# Allegro board AVALON.brd
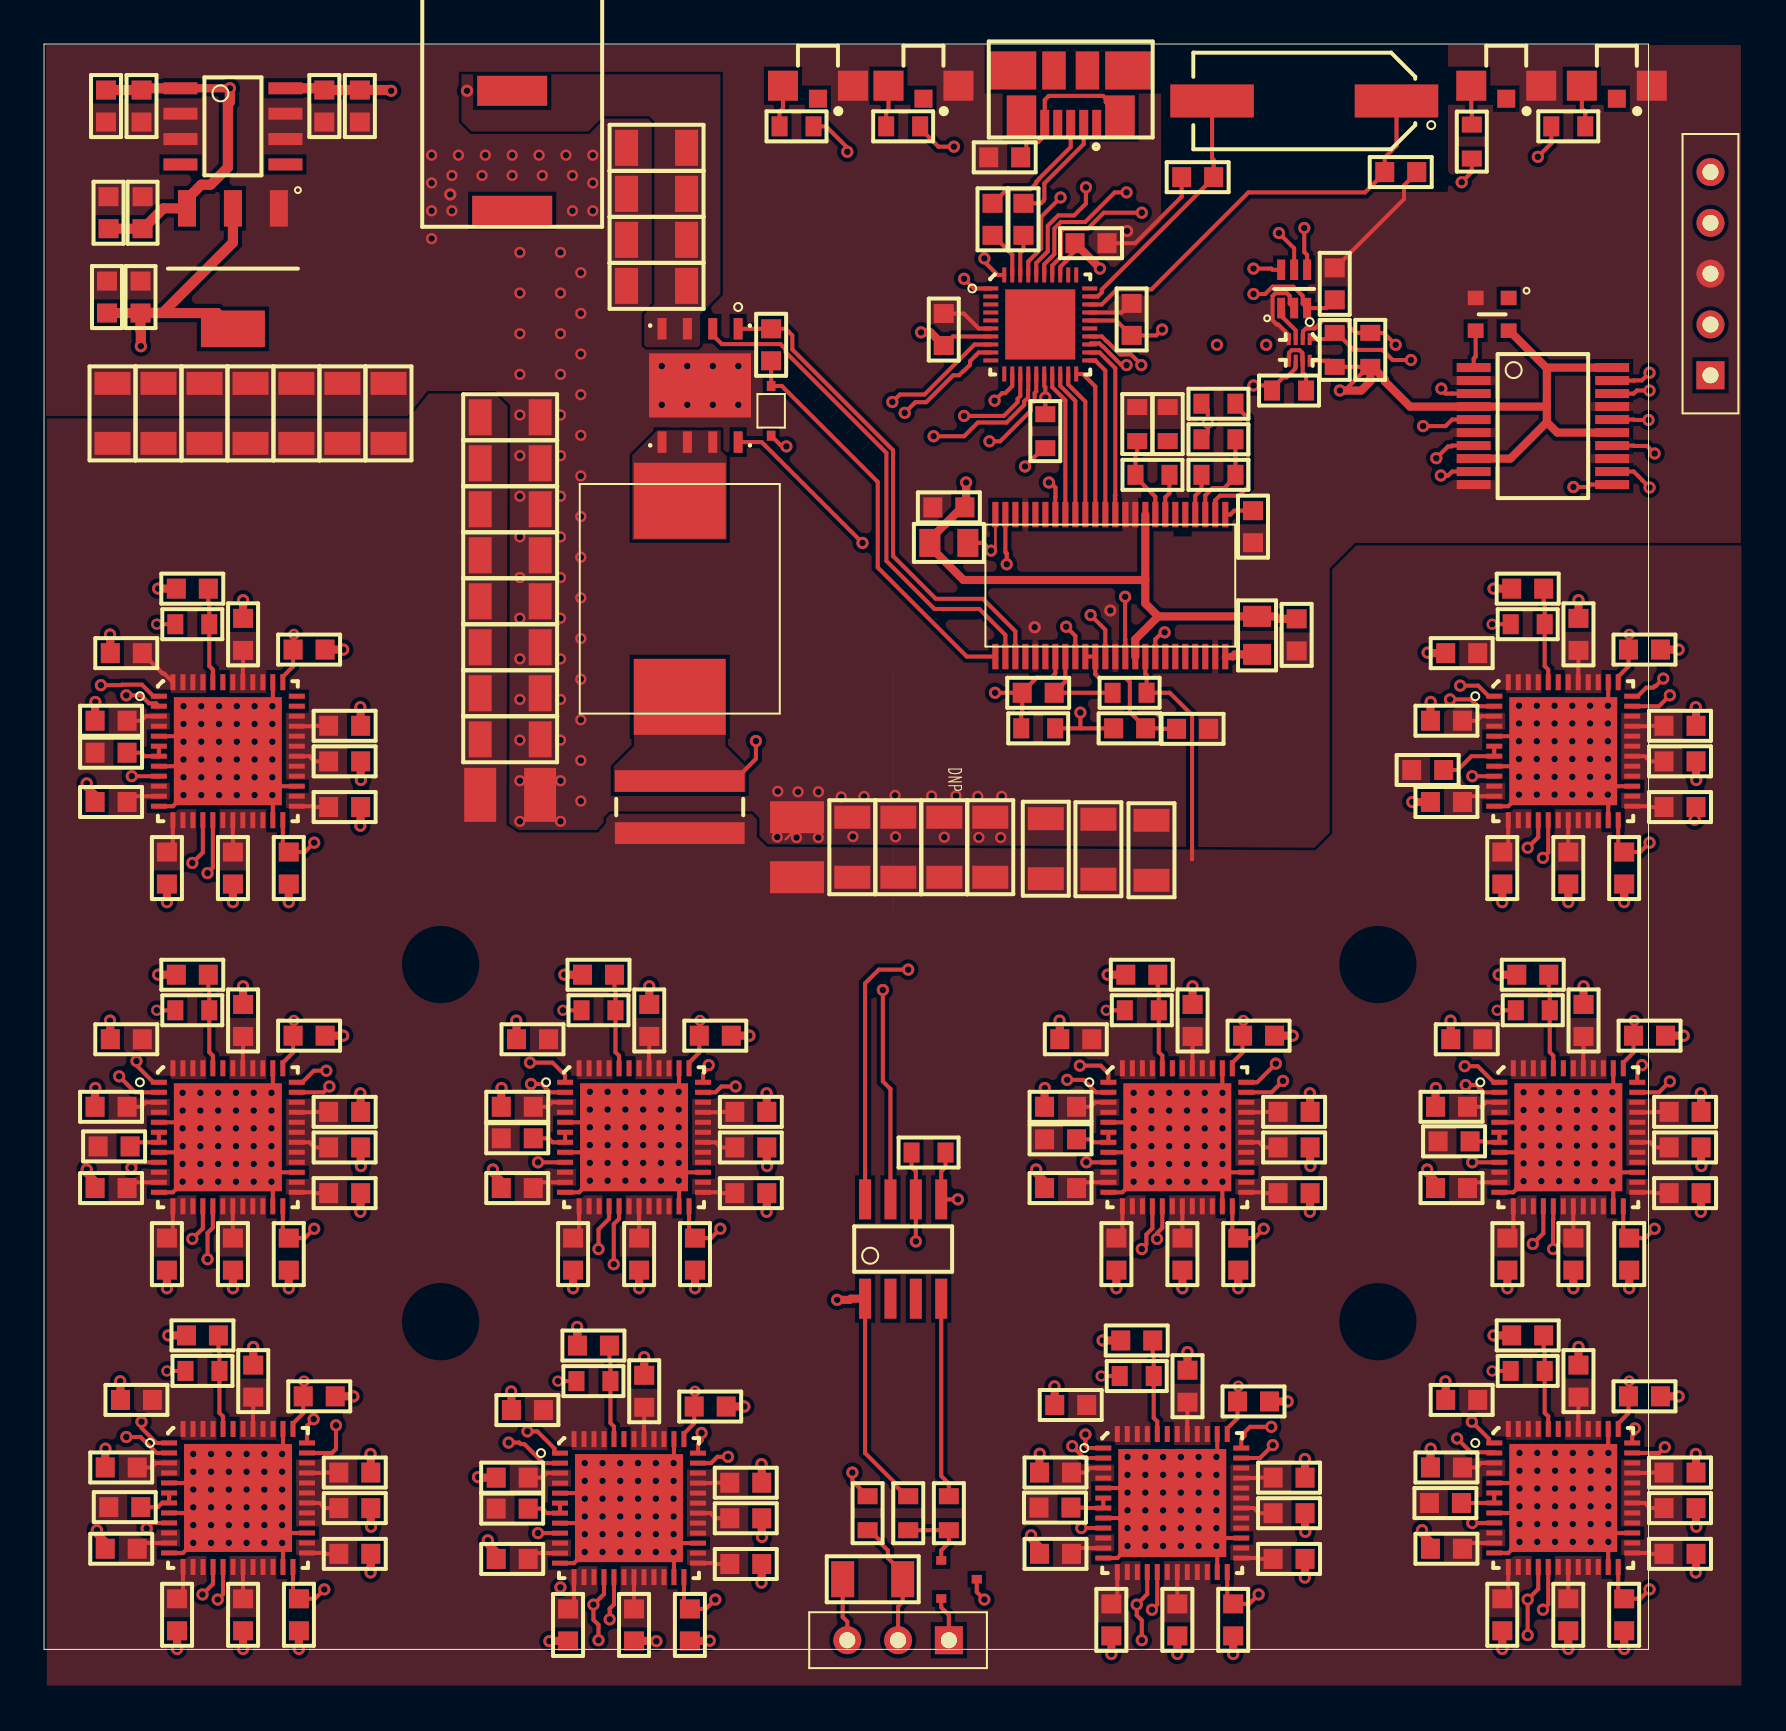
[diagram p0: board, top side]
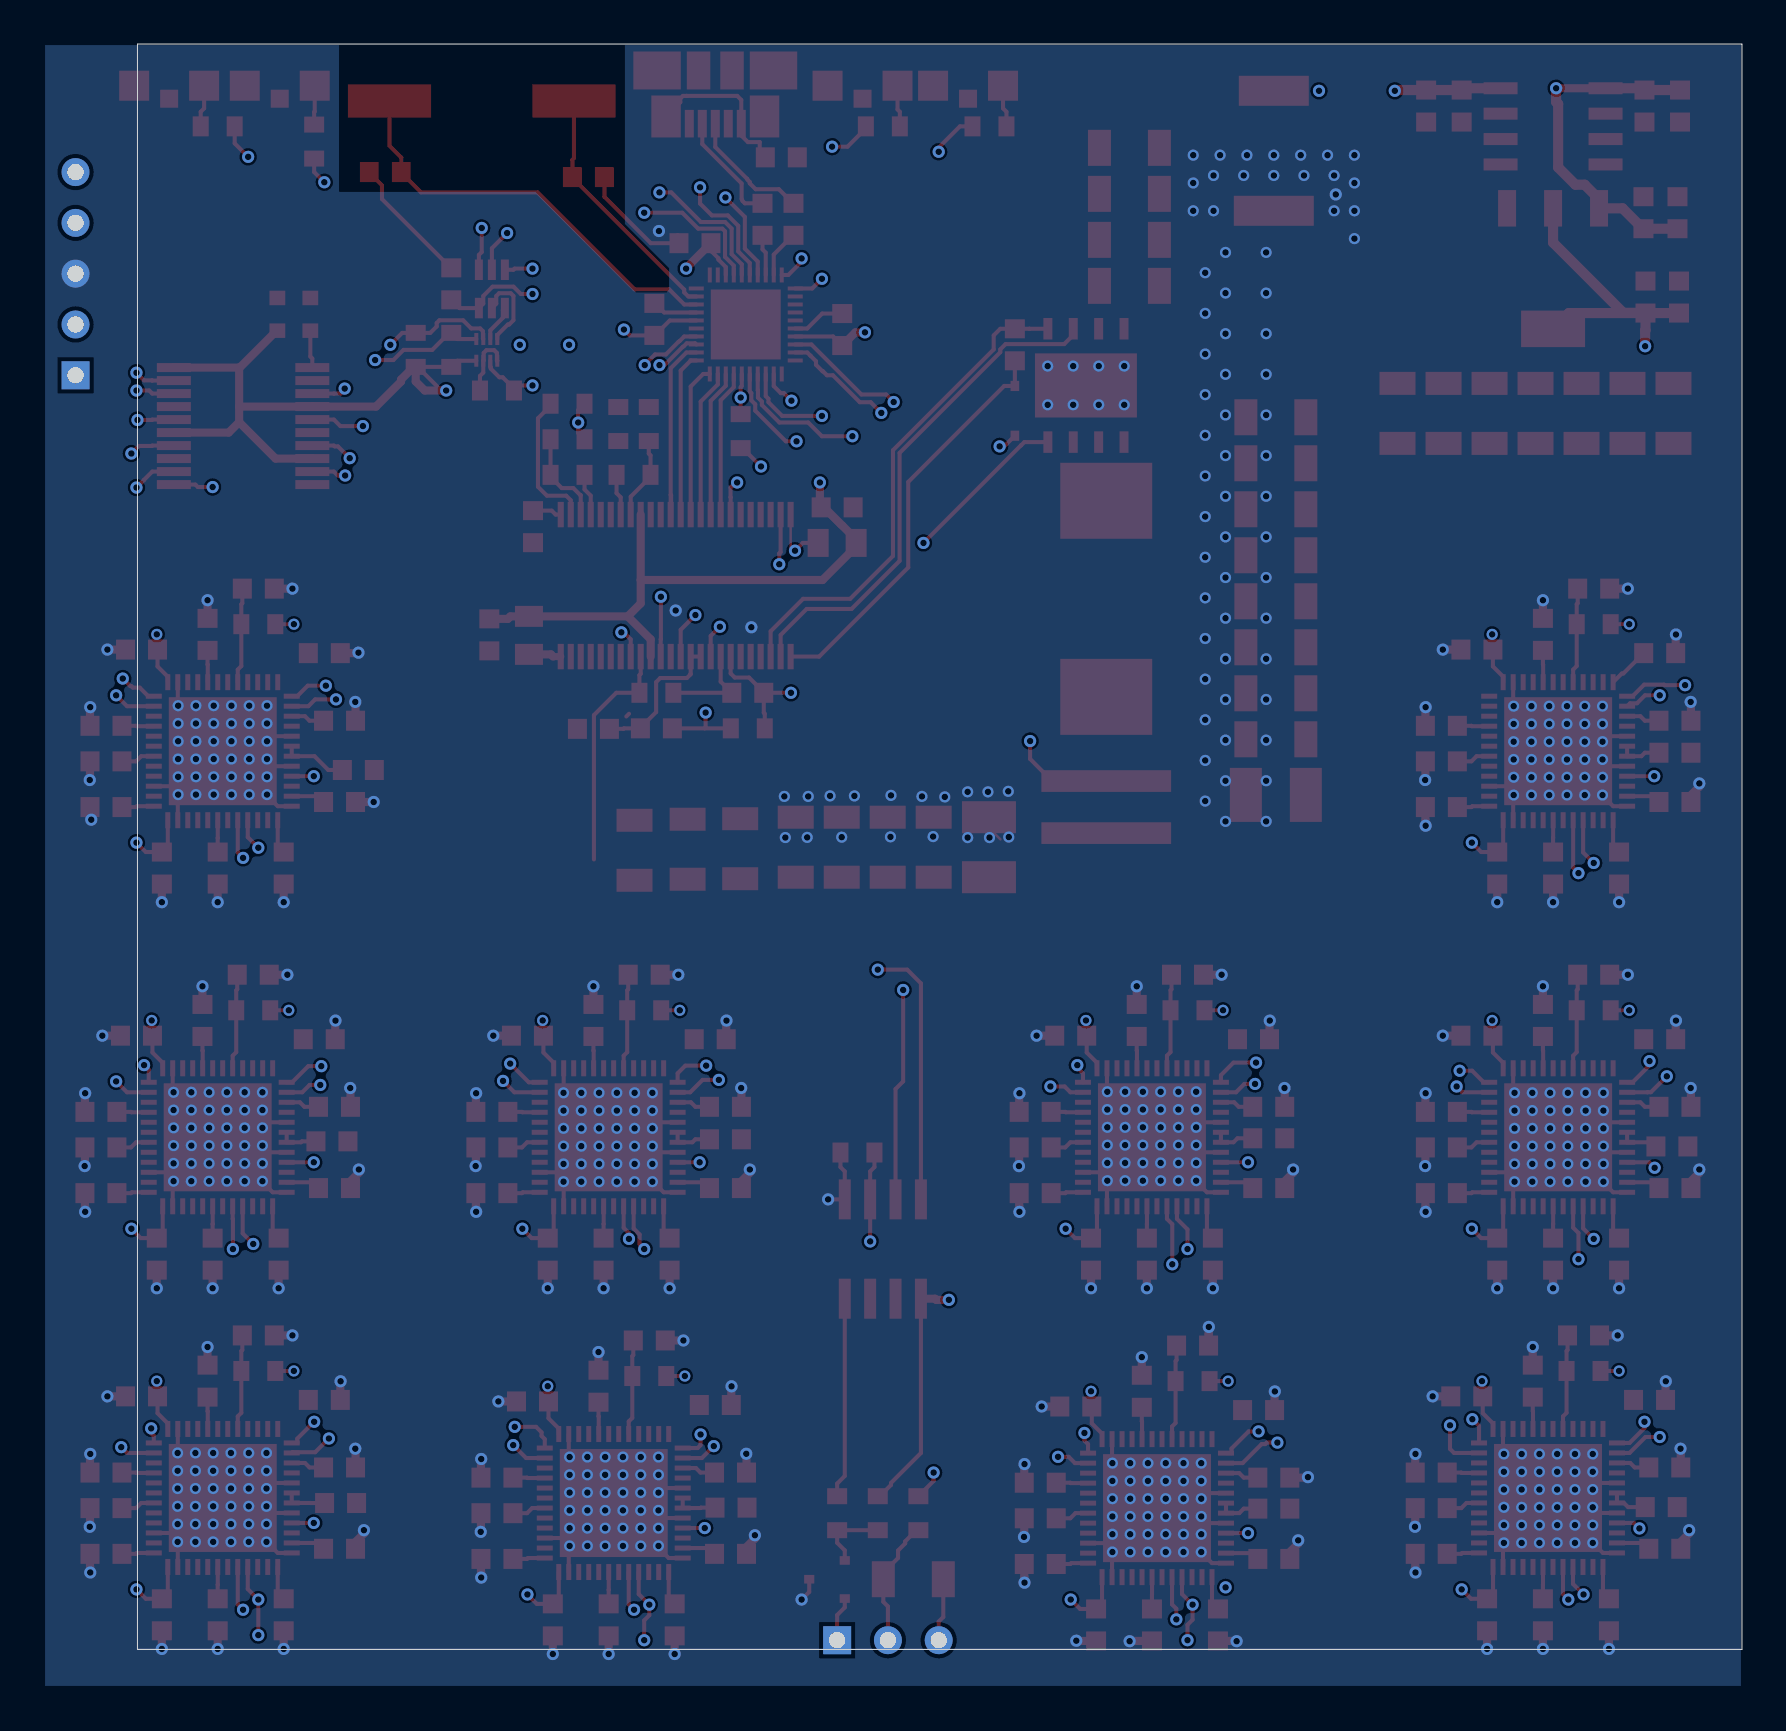
[diagram p1: board, bottom side, seen from below]

Outline 85.34 x 82.55 mm; copper layers: TOP, SIGNAL2, SIGNAL3, BOTTOM. Coordinates in mm from the lower left corner of the outline.
Outline path: 0,82.55 85.34,82.55 85.34,0 0,0 0,82.55 ; 0.2,82.35 80.47,82.35 80.47,2.08 0.2,2.08 0.2,82.35

## Placement (name value [footprint] x y rotation side)
C1  330uF  [CAP_2917]  23.52 44.81 0 top
C2  330uF  [CAP_2917]  37.87 42.19 90 top
C3  22uF  [CAP_0603]  36.58 67.31 90 top
C4  1200pF  [CAP_0603]  49.94 49.91 0 top
C5  1200pF  [CAP_0603]  54.51 48.13 180 top
C6  0.1uF  [CAP_0603]  57.66 48.11 0 top
C7  0.022uF  [CAP_0603]  60.68 58.22 90 top
C8  1uF  [CAP_0603]  62.86 52.81 90 top
C9  1uF  [CAP_0603]  45.47 59.18 0 top
C10  4.7uF  [CAP_1206]  30.84 77.16 0 top
C11  4.7uF  [CAP_1206]  30.84 72.56 0 top
C12  4.7uF  [CAP_1206]  30.84 74.86 0 top
C13  4.7uF  [CAP_1206]  30.84 70.26 0 top
C14  22uF  [CAP_1206]  23.52 47.59 0 top
C15  22uF  [CAP_1206]  45.24 42.19 90 top
C16  22uF  [CAP_1206]  15.13 63.88 90 top
C17  22uF  [CAP_1206]  8.23 63.88 90 top
C18  22uF  [CAP_1206]  3.63 63.88 90 top
C19  22uF  [CAP_1206]  17.43 63.88 90 top
C20  22uF  [CAP_1206]  50.32 42.11 90 top
C21  22uF  [CAP_1206]  10.53 63.88 90 top
C22  22uF  [CAP_1206]  12.83 63.88 90 top
C23  22uF  [CAP_1206]  5.93 63.88 90 top
C24  22uF  [CAP_1206]  23.52 52.19 0 top
C25  22uF  [CAP_1206]  47.54 42.19 90 top
C26  22uF  [CAP_1206]  42.94 42.19 90 top
C27  22uF  [CAP_1206]  40.64 42.19 90 top
C28  22uF  [CAP_1206]  23.52 49.89 0 top
C29  22uF  [CAP_1206]  23.52 63.69 0 top
C30  22uF  [CAP_1206]  23.52 61.39 0 top
C31  22uF  [CAP_1206]  55.6 42.04 90 top
C32  22uF  [CAP_1206]  23.52 56.79 0 top
C33  22uF  [CAP_1206]  52.95 42.09 90 top
C34  22uF  [CAP_1206]  23.52 54.49 0 top
C35  22uF  [CAP_1206]  23.52 59.09 0 top
C36  0.01uF  [CAP_0603]  3.35 69.7 90 top
C37  4.7uF  [CAP_0603]  5.03 69.7 90 top
C38  0.01uF  [CAP_0603]  5.13 73.91 90 top
C39  4.7uF  [CAP_0603]  3.43 73.91 90 top
C40  0.01uF  [CAP_0603]  14.22 79.25 270 top
C41  4.7uF  [CAP_0603]  16 79.25 270 top
C42  0.01uF  [CAP_0603]  5.08 79.25 270 top
C43  4.7uF  [CAP_0603]  3.3 79.25 270 top
C44  0.01uF  [CAP_0603]  45.21 68.07 90 top
C45  4.7uF  [CAP_0603]  52.58 72.39 0 top
C46  0.01uF  [CAP_0603]  54.61 68.58 90 top
C47  0.47uF  [CAP_0603]  35.31 8.64 0 top
C48  0.47uF  [CAP_0603]  24.38 14.05 180 top
C49  0.47uF  [CAP_0603]  26.42 3.3 270 top
C50  0.47uF  [CAP_0603]  35.31 6.35 0 top
C51  0.47uF  [CAP_0603]  29.72 3.3 270 top
C52  0.47uF  [CAP_0603]  30.23 14.99 90 top
C53  0.47uF  [CAP_0603]  23.88 25.15 180 top
C54  0.47uF  [CAP_0603]  23.62 10.67 180 top
C55  0.47uF  [CAP_0603]  33.53 14.22 0 top
C56  0.47uF  [CAP_0603]  32.51 3.3 270 top
C57  0.47uF  [CAP_0603]  27.94 35.81 0 top
C58  0.47uF  [CAP_0603]  35.56 28.96 0 top
C59  0.47uF  [CAP_0603]  35.56 27.18 0 top
C60  0.47uF  [CAP_0603]  24.64 32.59 180 top
C61  0.47uF  [CAP_0603]  26.67 21.84 270 top
C62  0.47uF  [CAP_0603]  35.56 24.89 0 top
C63  0.47uF  [CAP_0603]  33.78 32.77 0 top
C64  0.47uF  [CAP_0603]  32.77 21.84 270 top
C65  0.47uF  [CAP_0603]  27.69 17.27 0 top
C66  0.47uF  [CAP_0603]  70.36 11.18 180 top
C67  0.47uF  [CAP_0603]  3.56 48.51 180 top
C68  0.47uF  [CAP_0603]  23.88 29.21 180 top
C69  0.47uF  [CAP_0603]  4.32 51.89 180 top
C70  0.47uF  [CAP_0603]  6.35 41.15 270 top
C71  0.47uF  [CAP_0603]  15.24 44.2 0 top
C72  0.47uF  [CAP_0603]  9.65 41.15 270 top
C73  0.47uF  [CAP_0603]  62.48 6.6 0 top
C74  0.47uF  [CAP_0603]  10.16 52.83 90 top
C75  0.47uF  [CAP_0603]  59.69 3.56 270 top
C76  0.47uF  [CAP_0603]  12.95 3.81 270 top
C77  0.47uF  [CAP_0603]  8.13 17.78 0 top
C78  0.47uF  [CAP_0603]  56.9 3.56 270 top
C79  0.47uF  [CAP_0603]  57.4 15.24 90 top
C80  0.47uF  [CAP_0603]  82.04 9.14 0 top
C81  0.47uF  [CAP_0603]  50.8 10.92 180 top
C82  0.47uF  [CAP_0603]  71.12 14.55 180 top
C83  0.47uF  [CAP_0603]  73.15 3.81 270 top
C84  0.47uF  [CAP_0603]  82.04 6.86 0 top
C85  0.47uF  [CAP_0603]  76.45 3.81 270 top
C86  0.47uF  [CAP_0603]  76.96 15.49 90 top
C87  0.47uF  [CAP_0603]  12.45 41.15 270 top
C88  0.47uF  [CAP_0603]  79.25 3.81 270 top
C89  0.47uF  [CAP_0603]  7.62 35.81 0 top
C90  0.47uF  [CAP_0603]  62.74 24.89 0 top
C91  0.47uF  [CAP_0603]  57.15 21.84 270 top
C92  0.47uF  [CAP_0603]  57.66 33.53 90 top
C93  0.47uF  [CAP_0603]  73.41 21.84 270 top
C94  0.47uF  [CAP_0603]  51.05 29.21 180 top
C95  0.47uF  [CAP_0603]  82.3 24.89 0 top
C96  0.47uF  [CAP_0603]  76.71 21.84 270 top
C97  0.47uF  [CAP_0603]  77.22 33.53 90 top
C98  0.47uF  [CAP_0603]  70.61 29.21 180 top
C99  0.47uF  [CAP_0603]  79.5 21.84 270 top
C100  0.47uF  [CAP_0603]  13.46 52.07 0 top
C101  0.47uF  [CAP_0603]  7.62 55.12 0 top
C102  0.47uF  [CAP_0603]  29.97 21.84 270 top
C103  0.47uF  [CAP_0603]  15.24 48.26 0 top
C104  0.47uF  [CAP_0603]  3.56 44.45 180 top
C105  0.47uF  [CAP_0603]  50.8 6.86 180 top
C106  0.47uF  [CAP_0603]  15.24 46.48 0 top
C107  0.47uF  [CAP_0603]  62.48 10.67 0 top
C108  0.47uF  [CAP_0603]  53.59 3.56 270 top
C109  0.47uF  [CAP_0603]  62.48 8.89 0 top
C110  0.47uF  [CAP_0603]  51.56 14.3 180 top
C111  0.47uF  [CAP_0603]  60.71 14.48 0 top
C112  0.47uF  [CAP_0603]  80.26 14.73 0 top
C113  0.47uF  [CAP_0603]  74.42 17.78 0 top
C114  0.47uF  [CAP_0603]  70.36 44.45 180 top
C115  0.47uF  [CAP_0603]  71.12 51.89 180 top
C116  0.47uF  [CAP_0603]  82.04 48.26 0 top
C117  0.47uF  [CAP_0603]  82.04 46.48 0 top
C118  0.47uF  [CAP_0603]  70.36 7.11 180 top
C119  0.47uF  [CAP_0603]  82.04 10.92 0 top
C120  0.47uF  [CAP_0603]  51.05 25.15 180 top
C121  0.47uF  [CAP_0603]  62.74 28.96 0 top
C122  0.47uF  [CAP_0603]  62.74 27.18 0 top
C123  0.47uF  [CAP_0603]  79.25 41.15 270 top
C124  0.47uF  [CAP_0603]  80.26 52.07 0 top
C125  0.47uF  [CAP_0603]  51.82 32.59 180 top
C126  0.47uF  [CAP_0603]  53.85 21.84 270 top
C127  0.47uF  [CAP_0603]  70.61 25.15 180 top
C128  0.47uF  [CAP_0603]  10.16 3.81 270 top
C129  0.47uF  [CAP_0603]  60.96 32.77 0 top
C130  0.47uF  [CAP_0603]  59.94 21.84 270 top
C131  0.47uF  [CAP_0603]  54.86 17.53 0 top
C132  0.47uF  [CAP_0603]  82.3 28.96 0 top
C133  0.47uF  [CAP_0603]  82.3 27.18 0 top
C134  0.47uF  [CAP_0603]  4.06 7.11 180 top
C135  0.47uF  [CAP_0603]  71.37 32.59 180 top
C136  0.47uF  [CAP_0603]  15.75 10.92 0 top
C137  0.47uF  [CAP_0603]  15.75 9.14 0 top
C138  0.47uF  [CAP_0603]  4.83 14.55 180 top
C139  0.47uF  [CAP_0603]  6.86 3.81 270 top
C140  0.47uF  [CAP_0603]  15.75 6.86 0 top
C141  0.47uF  [CAP_0603]  80.52 32.77 0 top
C142  0.47uF  [CAP_0603]  13.97 14.73 0 top
C143  0.47uF  [CAP_0603]  55.12 35.81 0 top
C144  0.47uF  [CAP_0603]  4.32 32.59 180 top
C145  0.47uF  [CAP_0603]  10.67 15.49 90 top
C146  0.47uF  [CAP_0603]  4.06 11.18 180 top
C147  0.47uF  [CAP_0603]  3.56 25.15 180 top
C148  0.47uF  [CAP_0603]  15.24 28.96 0 top
C149  0.47uF  [CAP_0603]  74.42 55.12 0 top
C150  0.47uF  [CAP_0603]  73.15 41.15 270 top
C151  0.47uF  [CAP_0603]  82.04 44.2 0 top
C152  0.47uF  [CAP_0603]  76.45 41.15 270 top
C153  0.47uF  [CAP_0603]  15.24 27.18 0 top
C154  0.47uF  [CAP_0603]  30.48 33.53 90 top
C155  0.47uF  [CAP_0603]  6.35 21.84 270 top
C156  0.47uF  [CAP_0603]  15.24 24.89 0 top
C157  0.47uF  [CAP_0603]  13.46 32.77 0 top
C158  0.47uF  [CAP_0603]  12.45 21.84 270 top
C159  0.47uF  [CAP_0603]  74.68 35.81 0 top
C160  0.47uF  [CAP_0603]  9.65 21.84 270 top
C161  0.47uF  [CAP_0603]  10.16 33.53 90 top
C162  0.47uF  [CAP_0603]  23.62 6.6 180 top
C163  0.47uF  [CAP_0603]  3.56 29.21 180 top
C164  0.47uF  [CAP_0603]  76.96 52.83 90 top
C165  0.47uF  [CAP_0603]  35.31 10.41 0 top
C166  0.47uF  [CAP_0603]  70.36 48.51 180 top
C167  30pF  [CAP_0603]  64.77 70.36 270 top
C168  XuF  [CAP_0603]  57.91 75.69 180 top
C169  XuF  [CAP_0603]  68.07 75.95 0 top
D1  CMDSH-3  [SOD323]  36.58 64.01 90 top
D2  LED  [APA3010SRCPRV-GX]  78.88 80.26 180 top
D3  LED  [APA3010SRCPRV-GX]  73.35 80.26 180 top
D4  LED  [APA3010SRCPRV-GX]  44.2 80.26 180 top
D5  LED  [APA3010SRCPRV-GX]  38.92 80.26 180 top
H1  Drill - Unplated M3  [PART_DRILL_M3_33000MM]  20.04 18.47 0 top
H2  Drill - Unplated M3  [PART_DRILL_M3_33000MM]  66.93 18.47 0 top
H3  Drill - Unplated M3  [PART_DRILL_M3_33000MM]  66.93 36.32 0 top
H4  Drill - Unplated M3  [PART_DRILL_M3_33000MM]  20.04 36.32 0 top
J1  CUI PJ-037BH  [CUI_PJ_037BH]  23.62 80.01 270 top
J2  ICSP  [HEADER100_5]  83.57 70.87 180 top
J3  Molex 0473460001  [MOLEX_0473460001]  51.56 81.03 270 top
J4  FAN  [HEADER100_3]  42.93 2.54 270 top
L1  560nH  [ETQ-P4L]  32 54.61 270 top
L2  BLM18HE102SN1D  [IND_0603]  49.2 73.58 270 top
L3  BLM18HE102SN1D  [IND_0603]  47.65 73.58 270 top
L4  BLM18HE102SN1D  [IND_0603]  48.26 76.68 180 top
L5  BLM18HE102SN1D  [IND_0603]  23.88 27.64 180 top
L6  BLM18HE102SN1D  [IND_0603]  23.62 9.12 180 top
L7  BLM18HE102SN1D  [IND_0603]  4.24 9.19 180 top
L8  BLM18HE102SN1D  [IND_0603]  3.71 27.23 180 top
L9  BLM18HE102SN1D  [IND_0603]  3.56 46.91 180 top
L10  BLM18HE102SN1D  [IND_0603]  69.42 46.05 180 top
L11  BLM18HE102SN1D  [IND_0603]  70.74 27.48 180 top
L12  BLM18HE102SN1D  [IND_0603]  70.31 9.4 180 top
L13  BLM18HE102SN1D  [IND_0603]  50.77 9.17 180 top
L14  BLM18HE102SN1D  [IND_0603]  51.05 27.58 180 top
Q1  BC817-25-7-F  [SOT23]  45.97 5.59 0 top
R1  10  [RES_0805]  60.88 52.78 90 top
R2  0  [RES_0603]  58.95 64.36 0 top
R3  5.11k  [RES_0603]  58.95 62.59 180 top
R4  0  [RES_0603]  58.95 60.81 0 top
R5  5.11k  [RES_0603]  56.41 63.35 270 top
R6  1.21k  [RES_0603]  55.65 60.81 0 top
R7  100k  [RES_0603]  54.89 63.35 270 top
R9  0.003  [RES_1225]  32 44.2 270 top
R10  182  [RES_0603]  54.51 49.91 0 top
R11  100  [RES_0603]  49.94 48.13 180 top
R12  2.2  [RES_0805]  45.47 57.4 180 top
R13  75-100  [RES_0603]  76.45 78.23 0 top
R14  75-100  [RES_0603]  71.63 77.47 90 top
R15  75-100  [RES_0603]  43.18 78.23 180 top
R16  75-100  [RES_0603]  37.85 78.23 180 top
R17  100k  [RES_0603]  27.94 34.04 0 top
R18  100k  [RES_0603]  27.69 15.49 0 top
R19  100k  [RES_0603]  8.13 16 0 top
R20  100k  [RES_0603]  7.62 34.04 0 top
R21  100k  [RES_0603]  7.62 53.34 0 top
R22  100k  [RES_0603]  74.42 16 0 top
R23  100k  [RES_0603]  54.86 15.75 0 top
R24  100k  [RES_0603]  55.12 34.04 0 top
R25  100k  [RES_0603]  74.42 53.34 0 top
R26  100k  [RES_0603]  74.68 34.04 0 top
R27  1k  [RES_0603]  64.77 67.06 270 top
R28  1k  [RES_0603]  66.55 67.06 270 top
R29  100  [RES_0603]  62.48 65.02 180 top
R30  40k  [RES_0603]  50.29 62.99 90 top
R31  1k, 1/4W  [RES_1206]  41.66 5.59 0 top
R32  13k  [RES_0603]  41.4 8.89 270 top
R33  10k  [RES_0603]  44.45 26.92 180 top
R34  10  [RES_0603]  45.47 8.89 270 top
R35  470  [RES_0603]  43.43 8.89 90 top
U1  LM27213  [DGG]  53.54 55.27 90 top
U3  AP1117IE33G-13  [SOT224]  9.65 71.12 270 top
U4  KA78L05AIDTF  [8-SOIC]  9.65 78.23 0 top
U5  IDT74FCT3807APYG  [20-SSOP]  75.18 63.25 0 top
U6  ASDMB-25.000MHz  [4-SMD-DFNLLC]  72.64 68.83 270 top
U7  PIC18F45K50  [40-UFQFN]  50.04 68.33 0 top
U8  BitSyncom A3255Q48  [QFN48]  29.72 27.69 0 top
U9  BitSyncom A3255Q48  [QFN48]  29.46 9.14 0 top
U10  BitSyncom A3255Q48  [QFN48]  9.91 9.65 0 top
U11  BitSyncom A3255Q48  [QFN48]  9.4 27.69 0 top
U12  BitSyncom A3255Q48  [QFN48]  9.4 46.99 0 top
U13  BitSyncom A3255Q48  [QFN48]  76.2 9.65 0 top
U14  BitSyncom A3255Q48  [QFN48]  56.64 9.4 0 top
U15  BitSyncom A3255Q48  [QFN48]  56.9 27.69 0 top
U16  BitSyncom A3255Q48  [QFN48]  76.2 46.99 0 top
U17  BitSyncom A3255Q48  [QFN48]  76.45 27.69 0 top
U18  74AUP2G02GF,115  [8-XSON]  62.99 67.06 270 top
U19  NL27WZ14DFT2G  [SC-88]  62.74 70.1 90 top
U20  LM63  [TI_D_R_PDSO_G8]  43.18 22.1 90 top
U21  CSD86350Q5D  [QFN127P600X500X150-9N]  33.02 65.28 270 top
Y1  CRYSTAL  [HC49_US]  63.25 79.5 180 top

## Library data of the parts
C1 C2 = CAPACITOR
C3-C169 = CAP NP: User Part Number: PartNr
D1 = DIODE SCHOTTKY
D2-D5 = LED_0
H1-H4 = Drill - Unplated M3
J1 = CONN JACK PWR_1
J2 = HEADER 5
J3 = Molex 0473460001
J4 = HEADER 3
L1 = INDUCTOR
L2-L14 = INDUCTOR_1: User Part Number: PartNr
Q1 = NPN BCE
R1-R7 R10-R35 = RESISTOR: User Part Number: PartNr
R9 = RESISTOR
U1 = LM27213
U3 = AP1117IE33G-13
U4 = KA78L05AIDTF
U5 = IDT74FCT3807APYG
U6 = ASDMB
U7 = PIC18F45K50
U8-U17 = BitSyncom A3255Q48
U18 = 74AUP2G02
U19 = NL27WZ14DFT2G
U20 = LM63
U21 = CSD86350Q5D
Y1 = CRYSTAL

## Footprints (pads in the part's own frame, mm; a bottom-side part is the same pattern mirrored in y, then rotated)
4-SMD-DFNLLC
  rect 0.725x0.79 smd: 1(-0.818,0.825) 2(-0.818,-0.825) 3(0.818,-0.825) 4(0.818,0.825)
8-SOIC
  rect 1.7x0.6 smd: 1(-2.625,1.905) 2(-2.625,0.635) 3(-2.625,-0.635) 4(-2.625,-1.905) 5(2.625,-1.905) 6(2.625,-0.635) 7(2.625,0.635) 8(2.625,1.905)
8-XSON
  rect 0.6x0.2 smd: 1(-0.543,0.525) 2(-0.543,0.175) 3(-0.543,-0.175) 4(-0.543,-0.525) 5(0.543,-0.525) 6(0.543,-0.175) 7(0.543,0.175) 8(0.543,0.525)
20-SSOP
  rect 1.7x0.45 smd: 1(-3.463,2.925) 2(-3.463,2.275) 3(-3.463,1.625) 4(-3.463,0.975) 5(-3.463,0.325) 6(-3.463,-0.325) 7(-3.463,-0.975) 8(-3.463,-1.625) 9(-3.463,-2.275) 10(-3.463,-2.925) 11(3.463,-2.925) 12(3.463,-2.275) 13(3.463,-1.625) 14(3.463,-0.975) 15(3.463,-0.325) 16(3.463,0.325) 17(3.463,0.975) 18(3.463,1.625) 19(3.463,2.275) 20(3.463,2.925)
40-UFQFN
  rect 3.5x3.5 smd: (0,0)
  rect 0.75x0.2 smd: 1(-2.475,1.8) 2(-2.475,1.4) 3(-2.475,1) 4(-2.475,0.6) 5(-2.475,0.2) 6(-2.475,-0.2) 7(-2.475,-0.6) 8(-2.475,-1) 9(-2.475,-1.4) 10(-2.475,-1.8) 21(2.475,-1.8) 22(2.475,-1.4) 23(2.475,-1) 24(2.475,-0.6) 25(2.475,-0.2) 26(2.475,0.2) 27(2.475,0.6) 28(2.475,1) 29(2.475,1.4) 30(2.475,1.8)
  rect 0.2x0.75 smd: 11(-1.8,-2.475) 12(-1.4,-2.475) 13(-1,-2.475) 14(-0.6,-2.475) 15(-0.2,-2.475) 16(0.2,-2.475) 17(0.6,-2.475) 18(1,-2.475) 19(1.4,-2.475) 20(1.8,-2.475) 31(1.8,2.475) 32(1.4,2.475) 33(1,2.475) 34(0.6,2.475) 35(0.2,2.475) 36(-0.2,2.475) 37(-0.6,2.475) 38(-1,2.475) 39(-1.4,2.475) 40(-1.8,2.475)
APA3010SRCPRV-GX
  rect 0.9x0.9 smd: (0,0.65)
  rect 1.5x1.5 smd: 1(-1.75,0) 2(1.75,0)
CAP_0603
  rect 0.95x1 smd: 1(-0.8,0) 2(0.8,0)
CAP_1206
  rect 1.15x1.8 smd: 1(-1.5,0) 2(1.5,0)
CAP_2917
  rect 1.6x2.7 smd: 1(-1.5,0) 2(1.5,0)
CUI_PJ_037BH
  rect 1.5x4 smd: 1(6,0)
  rect 1.5x3.5 smd: 2(0,0)
DGG
  rect 1.27x0.305 smd: 1(-3.55,5.75) 2(-3.55,5.25) 3(-3.55,4.75) 4(-3.55,4.25) 5(-3.55,3.75) 6(-3.55,3.25) 7(-3.55,2.75) 8(-3.55,2.25) 9(-3.55,1.75) 10(-3.55,1.25) 11(-3.55,0.75) 12(-3.55,0.25) 13(-3.55,-0.25) 14(-3.55,-0.75) 15(-3.55,-1.25) 16(-3.55,-1.75) 17(-3.55,-2.25) 18(-3.55,-2.75) 19(-3.55,-3.25) 20(-3.55,-3.75) 21(-3.55,-4.25) 22(-3.55,-4.75) 23(-3.55,-5.25) 24(-3.55,-5.75) 25(3.55,-5.75) 26(3.55,-5.25) 27(3.55,-4.75) 28(3.55,-4.25) 29(3.55,-3.75) 30(3.55,-3.25) 31(3.55,-2.75) 32(3.55,-2.25) 33(3.55,-1.75) 34(3.55,-1.25) 35(3.55,-0.75) 36(3.55,-0.25) 37(3.55,0.25) 38(3.55,0.75) 39(3.55,1.25) 40(3.55,1.75) 41(3.55,2.25) 42(3.55,2.75) 43(3.55,3.25) 44(3.55,3.75) 45(3.55,4.25) 46(3.55,4.75) 47(3.55,5.25) 48(3.55,5.75)
ETQ-P4L
  rect 3.8x4.6 smd: 1(-4.902,0) 2(4.902,0)
HC49_US
  rect 4.175x1.65 smd: 1(-4.613,0) 2(4.613,0)
HEADER100_3
  rect 1.4x1.4 hole 0.8: 1(0,2.54)
  round 1.4 hole 0.8: 2(0,0) 3(0,-2.54)
HEADER100_5
  rect 1.4x1.4 hole 0.8: 1(0,5.08)
  round 1.4 hole 0.8: 2(0,2.54) 3(0,0) 4(0,-2.54) 5(0,-5.08)
IND_0603
  rect 0.95x1 smd: 1(-0.8,0) 2(0.8,0)
MOLEX_0473460001
  rect 1.9x2.375 smd: (0,2.913) (0,-2.913)
  rect 1.9x1.175 smd: (0,0.837) (0,-0.837)
  rect 2.1x1.475 smd: (2.3,-2.462) 6(2.3,2.463)
  rect 1.38x0.45 smd: 1(2.66,1.3) 2(2.66,0.65) 3(2.66,0) 4(2.66,-0.65) 5(2.66,-1.3)
PART_DRILL_M3_33000MM
  round 0 smd: 1(0,0)
QFN48
  rect 0.8x0.25 smd: 1(-3.45,2.75) 2(-3.45,2.25) 3(-3.45,1.75) 4(-3.45,1.25) 5(-3.45,0.75) 6(-3.45,0.25) 7(-3.45,-0.25) 8(-3.45,-0.75) 9(-3.45,-1.25) 10(-3.45,-1.75) 11(-3.45,-2.25) 12(-3.45,-2.75) 25(3.45,-2.75) 26(3.45,-2.25) 27(3.45,-1.75) 28(3.45,-1.25) 29(3.45,-0.75) 30(3.45,-0.25) 31(3.45,0.25) 32(3.45,0.75) 33(3.45,1.25) 34(3.45,1.75) 35(3.45,2.25) 36(3.45,2.75)
  rect 0.25x0.8 smd: 13(-2.75,-3.45) 14(-2.25,-3.45) 15(-1.75,-3.45) 16(-1.25,-3.45) 17(-0.75,-3.45) 18(-0.25,-3.45) 19(0.25,-3.45) 20(0.75,-3.45) 21(1.25,-3.45) 22(1.75,-3.45) 23(2.25,-3.45) 24(2.75,-3.45) 37(2.75,3.45) 38(2.25,3.45) 39(1.75,3.45) 40(1.25,3.45) 41(0.75,3.45) 42(0.25,3.45) 43(-0.25,3.45) 44(-0.75,3.45) 45(-1.25,3.45) 46(-1.75,3.45) 47(-2.25,3.45) 48(-2.75,3.45)
  rect 5.4x5.4 smd: 49(0,0)
QFN127P600X500X150-9N
  rect 1.075x0.45 smd: 1(-2.833,-1.905) 2(-2.833,-0.635) 3(-2.833,0.635) 4(-2.833,1.905) 5(2.833,1.905) 6(2.833,0.635) 7(2.833,-0.635) 8(2.833,-1.905)
  rect 3.206x5.1 smd: 9(0,0)
RES_0603
  rect 0.8x1 smd: 1(-0.85,0) 2(0.85,0)
RES_0805
  rect 1.05x1.4 smd: 1(-0.95,0) 2(0.95,0)
RES_1206
  rect 1.15x1.8 smd: 1(-1.5,0) 2(1.5,0)
RES_1225
  rect 1.085x6.49 smd: 1(-1.301,0) 2(1.301,0)
SC-88
  rect 1.025x0.4 smd: 1(-0.958,0.65) 2(-0.958,0) 3(-0.958,-0.65) 4(0.958,-0.65) 5(0.958,0) 6(0.958,0.65)
SOD323
  rect 0.508x0.432 smd: 1(-1.245,0) 2(1.245,0)
SOT23
  rect 0.508x0.432 smd: 1(-0.889,0.94) 2(-0.889,-0.965) 3(0.889,0)
SOT224
  rect 1.825x0.9 smd: 1(-3.013,2.3) 2(-3.013,0) 3(-3.013,-2.3)
  rect 1.825x3.2 smd: 4(3.013,0)
TI_D_R_PDSO_G8
  rect 2x0.6 smd: 1(-2.483,1.905) 2(-2.483,0.635) 3(-2.483,-0.635) 4(-2.483,-1.905) 5(2.483,-1.905) 6(2.483,-0.635) 7(2.483,0.635) 8(2.483,1.905)

## Nets
3V3: C36.1 C37.1 C44.1 C45.1 C46.1 C55.1 C56.1 C63.1 C64.1 C75.1 C76.1 C87.1 C88.1 C99.1 C100.1 C111.1 C112.1 C123.1 C124.1 C129.1 C130.1 C141.1 C142.1 C157.1 C158.1 J2.2 R17.1 R18.1 R19.1 R20.1 R21.1 R22.1 R23.1 R24.1 R25.1 R26.1 R27.2 R28.2 R30.1 R35.2 U3.2(VOUT) U3.4(VOUT2) U5.4(VCC) U5.8(VCC2) U5.15(VCC3) U5.20(VCC4) U6.4(VDD) U7.7(VDD) U7.26(VDD2) U7.33(VUSB3V3) U8.24(OVDD1) U8.37(OVDD0) U9.24(OVDD1) U9.37(OVDD0) U10.24(OVDD1) U10.37(OVDD0) U11.24(OVDD1) U11.37(OVDD0) U12.24(OVDD1) U12.37(OVDD0) U13.24(OVDD1) U13.37(OVDD0) U14.24(OVDD1) U14.37(OVDD0) U15.24(OVDD1) U15.37(OVDD0) U16.24(OVDD1) U16.37(OVDD0) U17.24(OVDD1) U17.37(OVDD0) U18.8(VCC) U19.5(VCC) U20.1(VDD)
5V0: C8.2 C9.2 C38.1 C39.1 C42.1 C43.1 R1.2 R12.2 U1.15(XPOK) U1.33(SLP) U1.42(VR_ON) U3.3(VIN) U4.1(VOUT)
GND: C1.2 C2.2 C6.2 C7.1 C8.1 C9.1 C10.1 C11.1 C12.1 C13.1 C14.2 C15.2 C16.2 C17.2 C18.2 C19.2 C20.2 C21.2 C22.2 C23.2 C24.2 C25.2 C26.2 C27.2 C28.2 C29.2 C30.2 C31.2 C32.2 C33.2 C34.2 C35.2 C36.2 C37.2 C38.2 C39.2 C40.2 C41.2 C42.2 C43.2 C44.2 C45.2 C46.2 C47.2 C48.2 C49.2 C50.2 C51.2 C52.2 C53.2 C54.2 C55.2 C56.2 C57.1 C58.2 C59.2 C60.2 C61.2 C62.2 C63.2 C64.2 C65.1 C66.2 C67.2 C68.2 C69.2 C70.2 C71.2 C72.2 C73.2 C74.2 C75.2 C76.2 C77.1 C78.2 C79.2 C80.2 C81.2 C82.2 C83.2 C84.2 C85.2 C86.2 C87.2 C88.2 C89.1 C90.2 C91.2 C92.2 C93.2 C94.2 C95.2 C96.2 C97.2 C98.2 C99.2 C100.2 C101.1 C102.2 C103.2 C104.2 C105.2 C106.2 C107.2 C108.2 C109.2 C110.2 C111.2 C112.2 C113.1 C114.2 C115.2 C116.2 C117.2 C118.2 C119.2 C120.2 C121.2 C122.2 C123.2 C124.2 C125.2 C126.2 C127.2 C128.2 C129.2 C130.2 C131.1 C132.2 C133.2 C134.2 C135.2 C136.2 C137.2 C138.2 C139.2 C140.2 C141.2 C142.2 C143.1 C144.2 C145.2 C146.2 C147.2 C148.2 C149.1 C150.2 C151.2 C152.2 C153.2 C154.2 C155.2 C156.2 C157.2 C158.2 C159.1 C160.2 C161.2 C162.2 C163.2 C164.2 C165.2 C166.2 C167.1 C168.2 C169.2 D2.1(CATHODE) D3.1(CATHODE) D4.1(CATHODE) D5.1(CATHODE) J1.2 J2.3 L4.2 Q1.3(E) R5.1 R7.1 R33.1 U1.5(SRCK) U1.13(DGND) U1.23(SGND) U1.34(STP_CPU#) U1.35(DE_EN#) U1.45(PGND) U3.1(GND) U4.2(GND) U4.3(GND2) U4.6(GND3) U4.7(GND4) U5.2(GND) U5.6(GND2) U5.10(GND3) U5.13(GND4) U5.17(GND5) U6.2(GND) U7.6(VSS) U7.27(VSS2) U8.5(VSSA_PLL) U8.8(VSS_PLL) U8.12(DVSS) U8.23(OVSS1) U8.27(VSS) U8.38(OVSS0) U8.49(EPVSS) U9.5(VSSA_PLL) U9.8(VSS_PLL) U9.12(DVSS) U9.23(OVSS1) U9.27(VSS) U9.38(OVSS0) U9.49(EPVSS) U10.5(VSSA_PLL) U10.8(VSS_PLL) U10.12(DVSS) U10.23(OVSS1) U10.27(VSS) U10.38(OVSS0) U10.49(EPVSS) U11.5(VSSA_PLL) U11.8(VSS_PLL) U11.12(DVSS) U11.23(OVSS1) U11.27(VSS) U11.38(OVSS0) U11.49(EPVSS) U12.5(VSSA_PLL) U12.8(VSS_PLL) U12.12(DVSS) U12.23(OVSS1) U12.27(VSS) U12.38(OVSS0) U12.49(EPVSS) U13.5(VSSA_PLL) U13.8(VSS_PLL) U13.12(DVSS) U13.23(OVSS1) U13.27(VSS) U13.38(OVSS0) U13.49(EPVSS) U14.5(VSSA_PLL) U14.8(VSS_PLL) U14.12(DVSS) U14.23(OVSS1) U14.27(VSS) U14.38(OVSS0) U14.49(EPVSS) U15.5(VSSA_PLL) U15.8(VSS_PLL) U15.12(DVSS) U15.23(OVSS1) U15.27(VSS) U15.38(OVSS0) U15.49(EPVSS) U16.5(VSSA_PLL) U16.8(VSS_PLL) U16.12(DVSS) U16.23(OVSS1) U16.27(VSS) U16.38(OVSS0) U16.49(EPVSS) U17.5(VSSA_PLL) U17.8(VSS_PLL) U17.12(DVSS) U17.23(OVSS1) U17.27(VSS) U17.38(OVSS0) U17.49(EPVSS) U18.4(GND) U19.2(GND) U20.5(GND) U21.9(PGND)
VIN: C10.2 C11.2 C12.2 C13.2 C40.1 C41.1 J1.1 J4.3 R31.1 U4.8(VIN) U21.1(VIN) U21.2(VIN2)
CK_EN: U1.12(CK_EN#) U7.23(RE0)
CLK1: U5.3(O1) U16.9(XCLKIN)
CLK2: U5.16(O8) U17.9(XCLKIN)
CLK3: U5.18(O9) U13.9(XCLKIN)
CLK4: U5.19(O10) U14.9(XCLKIN)
CLK5: U5.14(O7) U15.9(XCLKIN)
CLK6: U5.11(O5) U8.9(XCLKIN)
CLK7: U5.12(O6) U9.9(XCLKIN)
CLK8: U5.9(O4) U10.9(XCLKIN)
CLK9: U5.7(O3) U11.9(XCLKIN)
CLK10: U5.5(O2) U12.9(XCLKIN)
D+: L3.2 U7.39(D+)
D-: L2.2 U7.38(D-)
FANCLK: U7.9(RB1) U20.8(SMBCLK)
FANDAT: U7.8(RB0) U20.7(SMBDAT)
FANPWM: R34.1 U20.4(PWM)
H: H1.1(H) H2.1(H) H3.1(H) H4.1(H)
IC1_NO: U16.35(CONFIG_NO) U17.2(CONFIG_NI)
IC1_PO: U16.36(CONFIG_PO) U17.1(CONFIG_PI)
IC2_NO: U13.2(CONFIG_NI) U17.35(CONFIG_NO)
IC2_PO: U13.1(CONFIG_PI) U17.36(CONFIG_PO)
IC3_NO: U13.35(CONFIG_NO) U14.2(CONFIG_NI)
IC3_PO: U13.36(CONFIG_PO) U14.1(CONFIG_PI)
IC4_NO: U14.35(CONFIG_NO) U15.2(CONFIG_NI)
IC4_PO: U14.36(CONFIG_PO) U15.1(CONFIG_PI)
IC5_NO: U8.2(CONFIG_NI) U15.35(CONFIG_NO)
IC5_PO: U8.1(CONFIG_PI) U15.36(CONFIG_PO)
IC6_NO: U8.35(CONFIG_NO) U9.2(CONFIG_NI)
IC6_PO: U8.36(CONFIG_PO) U9.1(CONFIG_PI)
IC7_NO: U9.35(CONFIG_NO) U10.2(CONFIG_NI)
IC7_PO: U9.36(CONFIG_PO) U10.1(CONFIG_PI)
IC8_NO: U10.35(CONFIG_NO) U11.2(CONFIG_NI)
IC8_PO: U10.36(CONFIG_PO) U11.1(CONFIG_PI)
IC9_NO: U11.35(CONFIG_NO) U12.2(CONFIG_NI)
IC9_PO: U11.36(CONFIG_PO) U12.1(CONFIG_PI)
ICSPCLK: J2.5 U7.14(RB6)
ICSPDAT: J2.4 U7.15(RB7)
INV_CLK: U18.3(2Y) U19.1(IN_A1)
INV_DAT: C167.2 R29.2 U18.6(2B) U19.3(IN_A2)
LED0: R13.1 U7.34(RD0)
LED1: R14.1 U7.35(RD1)
LED2: R15.1 U7.36(RD2)
LED3: R16.1 U7.37(RD3)
MCLR: J2.1 R30.2 U7.16(MCLR/VPP/RE3)
OSC1: C169.1 U7.28(RA7) Y1.1
OSC2: C168.1 U7.29(RA6) Y1.2
PGOOD: U1.14(PGOOD) U7.24(RE1)
REP_N: R28.1 U8.16(REPORT_N) U9.16(REPORT_N) U10.16(REPORT_N) U11.16(REPORT_N) U12.16(REPORT_N) U13.16(REPORT_N) U14.16(REPORT_N) U15.16(REPORT_N) U16.16(REPORT_N) U17.16(REPORT_N) U18.2(1B)
REP_P: R27.1 U8.17(REPORT_P) U9.17(REPORT_P) U10.17(REPORT_P) U11.17(REPORT_P) U12.17(REPORT_P) U13.17(REPORT_P) U14.17(REPORT_P) U15.17(REPORT_P) U16.17(REPORT_P) U17.17(REPORT_P) U18.1(1A)
RESPONSE_CLK: U7.40(RC6) U19.4(OUT_Y1)
RESPONSE_DAT: U7.1(RC7) U19.6(OUT_Y2)
UC_NO: U7.13(RB5) U16.2(CONFIG_NI)
UC_PO: U7.12(RB4) U16.1(CONFIG_PI)
VCORE: C1.1 C2.1 C14.1 C15.1 C16.1 C17.1 C18.1 C19.1 C20.1 C21.1 C22.1 C23.1 C24.1 C25.1 C26.1 C27.1 C28.1 C29.1 C30.1 C31.1 C32.1 C33.1 C34.1 C35.1 C47.1 C48.1 C49.1 C50.1 C51.1 C52.1 C53.1 C54.1 C58.1 C59.1 C60.1 C61.1 C62.1 C66.1 C67.1 C68.1 C69.1 C70.1 C71.1 C72.1 C73.1 C74.1 C78.1 C79.1 C80.1 C81.1 C82.1 C83.1 C84.1 C85.1 C86.1 C90.1 C91.1 C92.1 C93.1 C94.1 C95.1 C96.1 C97.1 C98.1 C102.1 C103.1 C104.1 C105.1 C106.1 C107.1 C108.1 C109.1 C110.1 C114.1 C115.1 C116.1 C117.1 C118.1 C119.1 C120.1 C121.1 C122.1 C125.1 C126.1 C127.1 C128.1 C132.1 C133.1 C134.1 C135.1 C136.1 C137.1 C138.1 C139.1 C140.1 C144.1 C145.1 C146.1 C147.1 C148.1 C150.1 C151.1 C152.1 C153.1 C154.1 C155.1 C156.1 C160.1 C161.1 C162.1 C163.1 C164.1 C165.1 C166.1 L5.2 L6.2 L7.2 L8.2 L9.2 L10.2 L11.2 L12.2 L13.2 L14.2 R9.2 R10.2 U1.16(SENSE) U8.3(DVDD) U8.4(DVDD2) U8.10(DVDD3) U8.11(DVDD4) U8.13(DVDD5) U8.14(DVDD6) U8.15(DVDD7) U8.18(DVDD8) U8.19(DVDD9) U8.20(DVDD10) U8.21(DVDD11) U8.22(DVDD12) U8.25(DVDD13) U8.26(DVDD14) U8.28(DVDD15) U8.29(DVDD16) U8.30(DVDD17) U8.31(DVDD18) U8.32(DVDD19) U8.33(DVDD20) U8.34(DVDD21) U8.39(DVDD22) U8.40(DVDD23) U8.41(DVDD24) U8.42(DVDD25) U8.45(DVDD26) U8.46(DVDD27) U8.47(DVDD28) U8.48(DVDD29) U9.3(DVDD) U9.4(DVDD2) U9.10(DVDD3) U9.11(DVDD4) U9.13(DVDD5) U9.14(DVDD6) U9.15(DVDD7) U9.18(DVDD8) U9.19(DVDD9) U9.20(DVDD10) U9.21(DVDD11) U9.22(DVDD12) U9.25(DVDD13) U9.26(DVDD14) U9.28(DVDD15) U9.29(DVDD16) U9.30(DVDD17) U9.31(DVDD18) U9.32(DVDD19) U9.33(DVDD20) U9.34(DVDD21) U9.39(DVDD22) U9.40(DVDD23) U9.41(DVDD24) U9.42(DVDD25) U9.45(DVDD26) U9.46(DVDD27) U9.47(DVDD28) U9.48(DVDD29) U10.3(DVDD) U10.4(DVDD2) U10.10(DVDD3) U10.11(DVDD4) U10.13(DVDD5) U10.14(DVDD6) U10.15(DVDD7) U10.18(DVDD8) U10.19(DVDD9) U10.20(DVDD10) U10.21(DVDD11) U10.22(DVDD12) U10.25(DVDD13) U10.26(DVDD14) U10.28(DVDD15) U10.29(DVDD16) U10.30(DVDD17) U10.31(DVDD18) U10.32(DVDD19) U10.33(DVDD20) U10.34(DVDD21) U10.39(DVDD22) U10.40(DVDD23) U10.41(DVDD24) U10.42(DVDD25) U10.45(DVDD26) U10.46(DVDD27) U10.47(DVDD28) U10.48(DVDD29) U11.3(DVDD) U11.4(DVDD2) U11.10(DVDD3) U11.11(DVDD4) U11.13(DVDD5) U11.14(DVDD6) U11.15(DVDD7) U11.18(DVDD8) U11.19(DVDD9) U11.20(DVDD10) U11.21(DVDD11) U11.22(DVDD12) U11.25(DVDD13) U11.26(DVDD14) U11.28(DVDD15) U11.29(DVDD16) U11.30(DVDD17) U11.31(DVDD18) U11.32(DVDD19) U11.33(DVDD20) U11.34(DVDD21) U11.39(DVDD22) U11.40(DVDD23) U11.41(DVDD24) U11.42(DVDD25) U11.45(DVDD26) U11.46(DVDD27) U11.47(DVDD28) U11.48(DVDD29) U12.3(DVDD) U12.4(DVDD2) U12.10(DVDD3) U12.11(DVDD4) U12.13(DVDD5) U12.14(DVDD6) U12.15(DVDD7) U12.18(DVDD8) U12.19(DVDD9) U12.20(DVDD10) U12.21(DVDD11) U12.22(DVDD12) U12.25(DVDD13) U12.26(DVDD14) U12.28(DVDD15) U12.29(DVDD16) U12.30(DVDD17) U12.31(DVDD18) U12.32(DVDD19) U12.33(DVDD20) U12.34(DVDD21) U12.39(DVDD22) U12.40(DVDD23) U12.41(DVDD24) U12.42(DVDD25) U12.45(DVDD26) U12.46(DVDD27) U12.47(DVDD28) U12.48(DVDD29) U13.3(DVDD) U13.4(DVDD2) U13.10(DVDD3) U13.11(DVDD4) U13.13(DVDD5) U13.14(DVDD6) U13.15(DVDD7) U13.18(DVDD8) U13.19(DVDD9) U13.20(DVDD10) U13.21(DVDD11) U13.22(DVDD12) U13.25(DVDD13) U13.26(DVDD14) U13.28(DVDD15) U13.29(DVDD16) U13.30(DVDD17) U13.31(DVDD18) U13.32(DVDD19) U13.33(DVDD20) U13.34(DVDD21) U13.39(DVDD22) U13.40(DVDD23) U13.41(DVDD24) U13.42(DVDD25) U13.45(DVDD26) U13.46(DVDD27) U13.47(DVDD28) U13.48(DVDD29) U14.3(DVDD) U14.4(DVDD2) U14.10(DVDD3) U14.11(DVDD4) U14.13(DVDD5) U14.14(DVDD6) U14.15(DVDD7) U14.18(DVDD8) U14.19(DVDD9) U14.20(DVDD10) U14.21(DVDD11) U14.22(DVDD12) U14.25(DVDD13) U14.26(DVDD14) U14.28(DVDD15) U14.29(DVDD16) U14.30(DVDD17) U14.31(DVDD18) U14.32(DVDD19) U14.33(DVDD20) U14.34(DVDD21) U14.39(DVDD22) U14.40(DVDD23) U14.41(DVDD24) U14.42(DVDD25) U14.45(DVDD26) U14.46(DVDD27) U14.47(DVDD28) U14.48(DVDD29) U15.3(DVDD) U15.4(DVDD2) U15.10(DVDD3) U15.11(DVDD4) U15.13(DVDD5) U15.14(DVDD6) U15.15(DVDD7) U15.18(DVDD8) U15.19(DVDD9) U15.20(DVDD10) U15.21(DVDD11) U15.22(DVDD12) U15.25(DVDD13) U15.26(DVDD14) U15.28(DVDD15) U15.29(DVDD16) U15.30(DVDD17) U15.31(DVDD18) U15.32(DVDD19) U15.33(DVDD20) U15.34(DVDD21) U15.39(DVDD22) U15.40(DVDD23) U15.41(DVDD24) U15.42(DVDD25) U15.45(DVDD26) U15.46(DVDD27) U15.47(DVDD28) U15.48(DVDD29) U16.3(DVDD) U16.4(DVDD2) U16.10(DVDD3) U16.11(DVDD4) U16.13(DVDD5) U16.14(DVDD6) U16.15(DVDD7) U16.18(DVDD8) U16.19(DVDD9) U16.20(DVDD10) U16.21(DVDD11) U16.22(DVDD12) U16.25(DVDD13) U16.26(DVDD14) U16.28(DVDD15) U16.29(DVDD16) U16.30(DVDD17) U16.31(DVDD18) U16.32(DVDD19) U16.33(DVDD20) U16.34(DVDD21) U16.39(DVDD22) U16.40(DVDD23) U16.41(DVDD24) U16.42(DVDD25) U16.45(DVDD26) U16.46(DVDD27) U16.47(DVDD28) U16.48(DVDD29) U17.3(DVDD) U17.4(DVDD2) U17.10(DVDD3) U17.11(DVDD4) U17.13(DVDD5) U17.14(DVDD6) U17.15(DVDD7) U17.18(DVDD8) U17.19(DVDD9) U17.20(DVDD10) U17.21(DVDD11) U17.22(DVDD12) U17.25(DVDD13) U17.26(DVDD14) U17.28(DVDD15) U17.29(DVDD16) U17.30(DVDD17) U17.31(DVDD18) U17.32(DVDD19) U17.33(DVDD20) U17.34(DVDD21) U17.39(DVDD22) U17.40(DVDD23) U17.41(DVDD24) U17.42(DVDD25) U17.45(DVDD26) U17.46(DVDD27) U17.47(DVDD28) U17.48(DVDD29)
VID0: U1.41(VID0) U7.17(RA0)
VID1: U1.40(VID1) U7.18(RA1)
VID2: U1.39(VID2) U7.19(RA2)
VID3: U1.38(VID3) U7.20(RA3)
VID4: U1.37(VID4) U7.21(RA4)
VID5: U1.36(VID5) U7.22(RA5)
VUSB: J3.1(VCC)
N09260: R2.2 U1.26(V1R7)
N09264: R1.1 U1.24(VDD)
N09284: D1.1(ANODE) R12.1 U1.48(PVDD)
N09297: C3.1 D1.2(CATHODE) U1.1(CBOOT)
N09312: C3.2 U1.3(SW) U21.4(TGR)
N09333: U1.2(HG) U21.3(TG)
N09337: U1.47(LG) U21.5(BG)
N09737: C4.1 L1.2 R9.1 R11.2 U1.7(ILIM)
N09769: C4.2 R10.1 U1.8(ILIMREF)
N09949: C5.2 R11.1 U1.9(CMP)
N09959: C5.1 C6.1 U1.10(CMPREF) U1.11(VREF)
N10238: R2.1 R3.2 U1.17(VOVP)
N10242: R3.1 R4.2 U1.27(VBOOT)
N10246: R4.1 R5.2 U1.28(VSLP)
N11769: R6.2 U1.31(VDAC)
N11775: R6.1 R7.2 U1.32(VSTP)
N12290: C7.2 U1.25(SS)
N13217: L1.1 U21.6(VSW) U21.7(VSW2) U21.8(VSW3)
N17851: D2.2(ANODE) R13.2
N17964: D3.2(ANODE) R14.2
N18200: D4.2(ANODE) R15.2
N18437: D5.2(ANODE) R16.2
N20040: U5.1(IN) U6.3(OUTPUT)
N41888: J3.5(GND) J3.6(SHIELD) L4.1
N56615: L5.1 U8.6(VDDA_PLL) U8.7(VDD_PLL)
N59408: C57.2 R17.2 U8.44(RSTIN)
N63965: L6.1 U9.6(VDDA_PLL) U9.7(VDD_PLL)
N64105: C65.2 R18.2 U9.44(RSTIN)
N65992: L7.1 U10.6(VDDA_PLL) U10.7(VDD_PLL)
N66132: C77.2 R19.2 U10.44(RSTIN)
N68134: L8.1 U11.6(VDDA_PLL) U11.7(VDD_PLL)
N68274: C89.2 R20.2 U11.44(RSTIN)
N71187: L9.1 U12.6(VDDA_PLL) U12.7(VDD_PLL)
N71327: C101.2 R21.2 U12.44(RSTIN)
N79243: L12.1 U13.6(VDDA_PLL) U13.7(VDD_PLL)
N79431: C113.2 R22.2 U13.44(RSTIN)
N80211: L13.1 U14.6(VDDA_PLL) U14.7(VDD_PLL)
N80361: C131.2 R23.2 U14.44(RSTIN)
N80743: L10.1 U16.6(VDDA_PLL) U16.7(VDD_PLL)
N81099: L14.1 U15.6(VDDA_PLL) U15.7(VDD_PLL)
N81231: C143.2 R24.2 U15.44(RSTIN)
N81631: C149.2 R25.2 U16.44(RSTIN)
N82159: L11.1 U17.6(VDDA_PLL) U17.7(VDD_PLL)
N82307: C159.2 R26.2 U17.44(RSTIN)
N125152: R29.1 U18.5(2A) U18.7(1Y)
N143816: R32.1 R33.2 U20.6(ALERT/TACH)
N143829: J4.2 R31.2 R32.2
N145139: J4.1 Q1.2(C)
N152495: Q1.1(B) R34.2 R35.1
N285277: J3.2(D-) L2.1
N285281: J3.3(D+) L3.1

Pads without a net: J3 4; U1 4 6 18 19 20 21 22 29 30 43 44 46; U4 4 5; U6 1; U7 2 3 4 5 10 11 25 30 31 32; U8 43; U9 43; U10 43; U11 43; U12 35 36 43; U13 43; U14 43; U15 43; U16 43; U17 43; U20 2 3

## Via types
v1: diameter 0.61, hole 0.33, TOP to BOTTOM, 274 vias
v2: diameter 0.559, hole 0.33, TOP to BOTTOM, 469 vias

## Routing (per net, layer and track width the routed paths; a pad name or vN(x,y) marks a point on that pad's centre or on a via; arc(x,y) is an arc through that point)
3V3: length 651.5
  TOP w0.203: U12.24 12.15,42.25 C87.1 13.25,41.95 v1(13.72,42.42) ; U17.24 79.2,22.94 C99.1 80.3,22.64 v1(80.77,23.11) ; C44.1 45.67,67.73 U7.7 ; U14.37 59.39,13.12 59.91,13.64 C111.1 59.94,14.52 v2(59.94,15.24) ; U14.24 59.39,4.65 C75.1 60.49,4.36 v1(60.96,4.83) ; v2(79.5,15.49) 79.5,14.77 C112.1 79.46,13.89 78.95,13.38 U13.37 ; U15.24 59.65,22.94 C130.1 60.74,22.64 v1(61.21,23.11) ; U20.1 41.27,11.9 42.77,10.4 42.77,10.3 43.33,9.74 R35.2 ; U7.26 53.84,68.53 54.58,67.78 C46.1 55.84,67.78 v1(56.13,68.07) ; U9.24 32.21,4.4 C56.1 33.31,4.1 v1(33.78,4.57) ; R22.1 v2(72.64,16) ; U7.33 51.04,71.2 51.4,71.57 51.4,71.64 51.73,71.97 51.73,72.32 51.78,72.36 C45.1 ; v2(33.02,33.53) 33.02,32.8 C63.1 32.98,31.93 32.47,31.41 U8.37 ; U16.24 78.95,42.25 C123.1 80.05,41.95 v1(80.52,42.42) ; U18.8 64.46,66.51 R27.2 66.45,66.21 65.27,65.02 ; R17.1 v2(26.16,34.04) ; R25.1 v2(72.64,53.34) ; U9.37 32.21,12.87 32.73,13.38 C55.1 32.77,14.26 v2(32.77,14.99) ; U12.37 12.15,50.72 12.66,51.23 C100.1 12.7,52.11 v2(12.7,52.83) ; R24.1 v2(53.34,34.04) ; R19.1 v2(6.35,16) ; R26.1 v2(72.9,34.04) ; U19.5 62.74,72.14 v1(61.98,72.9) ; v2(79.5,52.83) 79.5,52.11 C124.1 79.46,51.23 78.95,50.72 U16.37 ; U8.24 32.47,22.94 C64.1 33.57,22.64 v1(34.04,23.11) ; U13.24 78.95,4.91 C88.1 80.05,4.61 v1(80.52,5.08) ; R20.1 v2(5.84,34.04) ; U15.37 59.65,31.41 60.16,31.93 C129.1 60.2,32.8 v2(60.2,33.53) ; v2(12.7,33.53) 12.7,32.8 C157.1 12.66,31.93 12.15,31.41 U11.37 ; U10.24 12.66,4.91 C76.1 13.75,4.61 v1(14.22,5.08) ; R21.1 v2(5.84,53.34) ; U11.24 12.15,22.94 C158.1 13.25,22.64 v1(13.72,23.11) ; v1(49.28,61.23) 50.19,62.14 R30.1 ; U10.37 12.66,13.38 13.17,13.89 C142.1 13.21,14.77 v2(13.21,15.49) ; v2(79.76,33.53) 79.76,32.8 C141.1 79.72,31.93 79.2,31.41 U17.37 ; R18.1 v2(25.91,15.49) ; R23.1 v2(53.09,15.75)
  TOP w0.406: 75.38,63.44 73.56,61.62 U5.8 ; 75.38,63.44 75.9,62.92 U5.15 ; 75.38,63.44 75.38,64.22 ; C44.1 44.55,67.93 v1(44.08,67.93) ; U5.20 75.41,66.17 75.38,66.14 ; 75.38,64.22 U5.4 68.53,64.22 67.28,65.47 67.28,65.57 66.65,66.21 R28.2 66.55,65.48 66.1,65.02 v1(65.02,65.02) ; 75.38,64.22 75.38,66.14 ; v1(39.88,19.56) 40.51,19.56 40.57,19.61 U20.1 ; 75.38,66.14 73.5,68.02 U6.4 ; C45.1 53.02,71.15 v1(53.02,71.12)
  TOP w0.508: C37.1 8.86,68.9 U3.4 ; C37.1 C36.1 ; C37.1 5.03,68.04 5.05,68.02 v1(5.05,67.24) ; U3.2 9.65,72.42 6.14,68.91 5,68.91
  SIGNAL2 w0.203: v2(12.7,33.53) 9.86,33.53 9.35,34.04 v2(5.84,34.04) ; v2(79.76,33.53) 76.91,33.53 76.4,34.04 v2(72.9,34.04) ; v2(6.35,16) 9.86,16 10.36,15.49 v2(13.21,15.49) ; v2(60.2,33.53) 57.35,33.53 56.85,34.04 v2(53.34,34.04) ; v2(25.91,15.49) 29.41,15.49 29.92,14.99 v2(32.77,14.99) ; v2(72.64,16) 76.15,16 76.66,15.49 v2(79.5,15.49) ; v2(26.16,34.04) 29.67,34.04 30.18,33.53 v2(33.02,33.53) ; v2(12.7,52.83) 9.86,52.83 9.35,53.34 v2(5.84,53.34) ; v2(59.94,15.24) 57.1,15.24 56.59,15.75 v2(53.09,15.75) ; v2(79.5,52.83) 76.66,52.83 76.15,53.34 v2(72.64,53.34)
  SIGNAL2 w0.406: v1(56.13,68.07) 57.63,66.57 61.04,66.57 62.59,65.02 v1(65.02,65.02) ; v1(44.08,67.93) 34.82,77.19 34.82,80.98 34.42,81.38 20.42,81.38 6.28,67.24 v1(5.05,67.24)
  SIGNAL3 w0.203: v1(13.72,42.42) 12.7,43.43 v2(12.7,52.83) ; v1(61.98,72.9) 61.6,72.52 60.58,72.52 v1(56.13,68.07) ; v1(60.96,4.83) 59.94,5.84 v2(59.94,15.24) ; v1(49.28,61.23) 49.28,67.31 48.51,68.07 ; v2(79.5,15.49) 79.07,15.06 79.07,6.53 v1(80.52,5.08) ; v1(61.21,23.11) 60.2,24.13 v2(60.2,33.53) ; v1(80.77,23.11) 79.4,24.49 79.4,33.17 v2(79.76,33.53) ; v1(34.04,23.11) 32.87,24.28 32.87,32.87 33.02,33.02 v2(33.02,33.53) ; v1(80.52,42.42) 79.5,43.43 v2(79.5,52.83) ; v1(14.22,5.08) 13.11,6.2 13.11,14.88 13.21,14.99 v2(13.21,15.49) ; v2(12.7,33.53) 12.7,24.13 v1(13.72,23.11) ; v1(33.78,4.57) 32.41,5.95 32.41,14.63 v2(32.77,14.99)
  SIGNAL3 w0.406: v2(26.16,34.04) 26.16,21.43 25.91,21.18 v2(25.91,15.49) ; v2(26.16,34.04) 29.18,34.04 29.69,33.53 v2(33.02,33.53) 39.88,33.53 ; v2(26.16,34.04) 25.55,34.04 25.35,34.24 17.78,34.24 17.27,34.75 17.27,52.07 12.95,56.39 5.08,56.39 ; 39.88,33.53 40.61,34.26 52.5,34.26 52.73,34.04 v2(53.34,34.04) ; 39.88,33.53 v1(39.88,19.56) ; v2(6.35,16) 5.56,16.79 5.56,32.16 5.08,32.64 5.08,34.8 ; 5.08,34.8 v2(5.84,34.04) ; 5.08,34.8 5.08,45.33 5.23,45.48 5.23,46 5.08,46.15 5.08,54.1 ; v1(56.13,68.07) 49.97,68.07 ; 49.97,68.07 48.51,68.07 48.37,67.93 v1(44.08,67.93) ; 49.97,68.07 v1(53.02,71.12) ; 5.08,56.39 5.08,54.1 ; 5.08,56.39 5.05,56.42 v1(5.05,67.24) ; 5.08,54.1 v2(5.84,53.34) ; v2(53.09,15.75) 52.4,16.43 52.4,20.96 53.34,21.9 v2(53.34,34.04) ; v2(53.34,34.04) 57.05,34.04 57.39,33.69 57.92,33.69 58.26,34.04 59.69,34.04 v2(60.2,33.53) 60.93,34.26 71.65,34.26 72.39,33.53 ; 72.39,33.53 v2(72.9,34.04) 72.9,34.82 72.19,35.53 72.19,45.38 72.28,45.48 72.28,46 72.19,46.1 72.19,52.26 72.64,52.72 v2(72.64,53.34) ; 72.39,33.53 72.06,33.2 72.06,26.92 72.28,26.7 72.28,26.17 72.06,25.95 72.06,16.59 v2(72.64,16)
5V0: length 107.7
  TOP w0.203: 46.25,59.16 45.35,58.27 45.2,58.27 ; v1(50.47,60.43) 50.55,60.43 50.8,60.17 50.8,59.69 50.79,59.68 U1.42
  TOP w0.406: C8.2 61.94,53.61 61.81,53.73 R1.2 55.94,53.73 ; 55.29,55.55 46.2,55.55 44.52,57.23 R12.2 44.52,57.58 46.1,59.16 46.25,59.16 C9.2 46.33,59.25 v1(46.33,60.43) ; 55.29,55.55 U1.33 ; 55.29,55.55 55.29,54.38 55.94,53.73 ; U1.15 54.79,52.58 55.94,53.73 ; 7.03,80.14 v1(9.5,80.14)
  TOP w0.508: C43.1 C42.1 5.17,80.14 7.03,80.14 ; C39.1 C38.1 5.16,73.11 6.17,74.13 U3.3 7.35,74.6 8.07,75.32 8.53,75.32 9.4,76.18 9.4,79.35 9.5,79.45 v1(9.5,80.14)
  SIGNAL3 w0.406: v1(9.5,80.14) 11.05,80.14 12.29,81.38 34.42,81.38 41.07,74.73 41.07,63.98 44.63,60.43 v1(46.33,60.43) v1(50.47,60.43)
GND: length 354.8
  TOP w0.127: 69.81,30.14 v1(69.82,30.15) ; 69.56,12.1 v1(69.57,12.12) ; 16.54,6.2 16.55,6.21 ; C147.2 2.76,25.49 ; C127.2 69.81,25.49 ; 50.25,30.14 v1(50.27,30.15) ; 22.17,10.67 22.15,10.69 v1(21.92,10.69) ; C53.2 23.08,25.49 ; v1(82.85,8.21) 82.85,8.33 82.84,8.34 ; 82.83,6.2 82.84,6.21 ; v1(70.56,33.52) 70.56,33.32 70.57,33.31 ; 4.03,15.28 4.01,15.29 v1(4.01,15.49) ; 82.84,49.14 82.83,49.15 v1(82.83,49.19) ; 36.36,29.83 36.35,29.85 v1(36.35,29.89) ; 3.26,12.1 v1(3.28,12.12) ; v1(16.05,26.25) 16.05,26.37 16.04,26.38 ; v1(82.83,11.85) 82.83,11.81 82.84,11.8 ; v1(63.27,11.6) 63.27,11.56 63.28,11.54 ; v1(23.83,33.52) 23.83,33.32 23.84,33.31 ; 63.27,5.94 63.28,5.96 ; v1(3.51,52.82) 3.51,52.63 3.52,52.62 ; v1(83.11,26.25) 83.11,26.37 83.1,26.38 ; 36.36,26.38 36.37,26.37 v1(36.37,26.25) ; 82.83,43.54 82.84,43.55 ; v1(50.75,15.23) 50.75,15.04 50.76,15.02 ; 63.54,26.38 63.55,26.37 v1(63.55,26.25) ; v1(16.03,29.89) 16.03,29.85 16.04,29.83 ; 63.54,29.83 63.53,29.85 v1(63.53,29.89) ; v1(23.57,14.98) 23.57,14.78 23.58,14.77 ; 83.08,24.23 83.1,24.24 ; 36.11,11.29 36.09,11.3 v1(36.09,11.35) ; 3.26,7.45 C134.2 ; C104.2 2.76,44.79 ; 16.04,45.68 16.05,45.67 v1(16.05,45.55) ; 63.53,24.23 63.54,24.24 ; v1(69.41,51.92) 69.42,51.92 69.44,51.89 ; 69.56,49.44 v1(69.57,49.45) ; 36.35,24.23 36.36,24.24 ; 37.85,43.13 37.3,42.58 ; v1(63.3,7.96) 63.3,8.08 63.28,8.09 ; C105.2 50,7.2 ; 83.1,29.83 83.08,29.85 v1(83.08,29.89) ; 3.52,33.31 3.51,33.32 v1(3.51,33.52) ; 50,11.85 v1(50.01,11.86) ; 70.32,15.28 70.31,15.29 v1(70.31,15.49) ; v1(82.85,45.55) 82.85,45.67 82.84,45.68 ; C162.2 22.82,6.95 ; 16.55,11.8 16.54,11.81 v1(16.54,11.85) ; 36.09,5.69 36.11,5.7 ; v1(16.03,49.19) 16.03,49.15 16.04,49.14 ; 2.76,30.14 v1(2.77,30.15) ; v1(51,33.52) 51,33.32 51.02,33.31 ; v1(16.56,8.21) 16.56,8.33 16.55,8.34 ; v1(36.12,7.7) 36.12,7.82 36.11,7.84 ; 16.03,24.23 16.04,24.24 ; 23.08,30.14 v1(23.09,30.15) ; 2.76,49.44 v1(2.77,49.45) ; C118.2 69.56,7.45 ; 16.03,43.54 16.04,43.55 ; C120.2 50.25,25.49
  TOP w0.203: 56.15,26.94 54.15,24.94 U15.12 ; 56.15,26.94 U15.49 ; 56.15,26.94 U15.8 ; U12.23 11.65,44.74 11.15,45.24 ; U15.49 56.15,28.44 U15.5 ; U15.49 58.65,25.94 ; U15.49 59.15,29.94 U15.38 ; 78.2,25.94 78.7,25.44 U17.23 ; 78.2,25.94 U17.49 ; 78.2,25.94 U17.27 ; 55.89,8.65 53.89,6.65 U14.12 ; 55.89,8.65 U14.49 ; 55.89,8.65 U14.8 ; U12.38 11.65,49.24 U12.49 ; v1(45.92,24.58) U20.5 45.08,25.98 45.3,26.2 R33.1 ; v1(47.24,4.57) 46.86,4.95 Q1.3 ; U13.5 75.45,10.4 U13.49 ; 58.65,25.94 59.15,25.44 U15.23 ; 58.65,25.94 U15.27 ; 53.44,72.8 53.38,72.73 53.38,72.4 ; U10.38 12.16,11.9 U10.49 ; U12.49 11.15,45.24 ; U12.49 8.65,47.74 U12.5 ; U12.49 8.65,46.24 ; U14.23 58.89,7.15 58.39,7.65 ; 77.95,45.24 U16.49 ; 77.95,45.24 U16.27 ; 77.95,45.24 78.45,44.74 U16.23 ; U16.49 78.45,49.24 U16.38 ; U16.49 75.45,46.24 ; U16.49 75.45,47.74 U16.5 ; U10.49 9.16,10.4 U10.5 ; U10.49 11.66,7.9 ; U10.49 9.16,8.9 ; U9.23 31.71,6.89 31.21,7.39 ; U11.49 8.65,26.94 ; U11.49 8.65,28.44 U11.5 ; U11.49 11.65,29.94 U11.38 ; U11.49 11.15,25.94 ; 8.65,26.94 U11.8 ; 8.65,26.94 6.65,24.94 U11.12 ; U13.38 78.45,11.9 U13.49 ; 8.65,46.24 6.65,44.24 U12.12 ; 8.65,46.24 U12.8 ; 77.95,7.9 78.45,7.4 U13.23 ; 77.95,7.9 U13.27 ; 77.95,7.9 U13.49 ; U9.49 28.71,9.89 U9.5 ; U9.49 28.71,8.39 ; U9.49 31.71,11.39 U9.38 ; U9.49 31.21,7.39 ; U13.12 73.45,6.9 75.45,8.9 ; 31.47,25.94 U8.27 ; 31.47,25.94 U8.49 ; 31.47,25.94 31.97,25.44 U8.23 ; 53.38,72.4 53.59,72.62 ; 53.38,72.4 C45.2 ; U13.49 75.45,8.9 ; U16.12 73.45,44.24 75.45,46.24 ; U9.12 26.71,6.39 28.71,8.39 ; U17.5 75.7,28.44 U17.49 ; C167.1 64.8,71.16 68.24,74.6 68.24,75.28 68.87,75.92 C169.2 ; C45.2 53.37,72.39 ; C45.2 54.79,72.39 57.11,74.71 C168.2 ; U8.38 31.97,29.94 U8.49 ; 11.66,7.9 12.16,7.4 U10.23 ; 11.66,7.9 U10.27 ; 28.71,8.39 U9.8 ; 11.15,25.94 11.65,25.44 U11.23 ; 11.15,25.94 U11.27 ; C44.2 46.21,68.87 46.96,68.13 U7.6 ; 75.7,26.94 U17.8 ; 75.7,26.94 73.7,24.94 U17.12 ; 75.7,26.94 U17.49 ; U8.49 28.97,28.44 U8.5 ; U8.49 28.97,26.94 ; 75.45,46.24 U16.8 ; U19.2 62.52,69.37 62.52,69.75 62.38,69.89 61.79,69.89 61.66,69.75 61.66,68.54 61.87,68.33 61.94,68.33 62.47,67.8 U18.4 ; U17.49 78.7,29.94 U17.38 ; 11.15,45.24 U12.27 ; 54.53,69.34 54.12,68.93 U7.27 ; 28.97,26.94 U8.8 ; 28.97,26.94 26.97,24.94 U8.12 ; 9.16,8.9 7.16,6.9 U10.12 ; 9.16,8.9 U10.8 ; U14.49 55.89,10.15 U14.5 ; U14.49 58.39,7.65 ; U14.49 58.89,11.65 U14.38 ; 31.21,7.39 U9.27 ; 75.45,8.9 U13.8 ; 58.39,7.65 U14.27 ; 55.88,48.86 56.01,48.73
  TOP w0.406: C102.2 v1(29.97,20.14) ; v1(2.84,8.04) 2.84,7.87 3.26,7.45 ; C80.2 82.84,8.34 ; C158.2 v1(12.45,20.14) ; C145.2 v1(10.67,17.2) ; C85.2 v1(76.45,2.1) ; C106.2 16.04,45.68 ; C52.2 v1(30.23,16.69) ; C66.2 69.56,12.1 ; C59.2 36.36,26.38 ; C144.2 3.52,33.31 ; C76.2 v1(12.95,2.1) ; C79.2 v1(57.4,16.95) ; 36.36,24.24 C62.2 ; v1(69.14,8.04) 69.14,7.87 69.56,7.45 ; v1(82.22,32.77) C141.2 ; v1(62.67,32.77) C129.2 ; C96.2 v1(76.71,20.14) ; v1(36.35,23.96) 36.35,24.23 ; v1(25.48,2.49) 25.65,2.49 25.67,2.5 C49.2 ; C64.2 v1(32.77,20.14) ; C164.2 v1(76.96,54.54) ; C82.2 70.32,15.28 ; v1(81.97,52.07) C124.2 ; C130.2 v1(59.94,20.14) ; v1(22.66,26.07) 22.66,25.91 23.08,25.49 ; v1(82.83,5.93) 82.83,6.2 ; 82.84,43.55 C151.2 ; v1(49.83,26.07) 49.83,25.91 50.25,25.49 ; C74.2 v1(10.16,54.54) ; C126.2 v1(53.85,20.14) ; v1(63.53,23.96) 63.53,24.23 ; C143.1 v1(53.41,35.81) ; 22.82,6.95 22.4,7.37 v1(22.4,7.53) ; C81.2 50,11.85 ; C148.2 16.04,29.83 ; v1(62.41,14.48) C111.2 ; C163.2 2.76,30.14 ; v1(35.49,32.77) C63.2 ; C69.2 3.52,52.62 ; C121.2 63.54,29.83 ; C109.2 63.28,8.09 ; 82.83,43.54 82.81,43.54 v1(82.78,43.57) ; C138.2 4.03,15.28 ; C94.2 50.25,30.14 ; 36.11,5.7 C50.2 ; C107.2 63.28,11.54 ; C153.2 16.04,26.38 ; v1(16.54,5.93) 16.54,6.2 ; C133.2 83.1,26.38 ; 63.54,24.24 C90.2 ; C89.1 v1(5.91,35.81) ; C139.2 v1(6.86,2.1) ; C161.2 v1(10.16,35.23) ; C72.2 v1(9.65,39.44) ; C116.2 82.84,49.14 ; C136.2 16.55,11.8 ; C135.2 70.57,33.31 ; C149.1 v1(72.72,55.12) ; v1(33.5,2.51) 33.49,2.5 C56.2 ; C67.2 2.76,49.44 ; C47.2 36.11,7.84 ; C77.1 v1(6.42,17.78) ; C57.1 v1(26.23,35.81) ; C86.2 v1(76.96,17.2) ; C154.2 v1(30.48,35.23) ; 2.76,44.79 2.34,45.21 v1(2.34,45.38) ; C87.2 v1(12.45,39.44) ; C122.2 63.54,26.38 ; v1(63.27,5.67) 63.27,5.94 ; C92.2 v1(57.66,35.23) ; C110.2 50.76,15.02 ; v1(15.17,32.77) C157.2 ; C113.1 v1(72.72,17.78) ; 16.04,24.24 C156.2 ; v1(16.03,23.96) 16.03,24.23 ; C93.2 v1(73.41,20.14) ; 50,7.2 49.58,7.62 v1(49.58,7.79) ; v1(30.84,2.49) 30.82,2.5 C51.2 ; C119.2 82.84,11.8 ; 82.84,6.21 C84.2 ; C65.1 26.89,17.84 26.87,17.86 v1(26.87,18.2) ; v1(35.23,14.22) C55.2 ; C155.2 v1(6.35,20.14) ; C166.2 69.56,49.44 ; 63.28,5.96 C73.2 ; C115.2 69.44,51.89 ; C68.2 23.08,30.14 ; C78.2 v1(56.9,1.85) ; C99.2 v1(79.5,20.14) ; 16.55,6.21 C140.2 ; C150.2 v1(73.15,39.44) ; C165.2 36.11,11.29 ; C83.2 v1(73.15,2.1) ; C108.2 v1(53.59,1.85) ; 83.1,24.24 C95.2 ; C48.2 23.58,14.77 ; C101.1 v1(5.91,55.12) ; v1(15.68,14.73) C142.2 ; C91.2 v1(57.15,20.14) ; C160.2 v1(9.65,20.14) ; C103.2 16.04,49.14 ; 16.04,43.55 C71.2 ; C146.2 3.26,12.1 ; v1(69.39,26.07) 69.39,25.91 69.81,25.49 ; C131.1 v1(53.16,17.53) ; C114.2 v1(68.65,44.45) ; C88.2 v1(79.25,2.1) ; C152.2 v1(76.45,39.44) ; v1(15.17,52.07) C100.2 ; C54.2 22.17,10.67 ; C132.2 83.1,29.83 ; C123.2 v1(79.25,39.44) ; C97.2 v1(77.22,35.23) ; C117.2 82.84,45.68 ; C128.2 v1(10.16,2.1) ; C61.2 v1(26.67,20.14) ; C98.2 69.81,30.14 ; v1(36.09,5.42) 36.09,5.69 ; C137.2 16.55,8.34 ; C159.1 v1(72.97,35.81) ; C75.2 v1(59.69,1.85) ; C60.2 23.84,33.31 ; v1(16.03,43.26) 16.03,43.54 ; C58.2 36.36,29.83 ; C70.2 v1(6.35,39.44) ; v1(81.97,14.73) C112.2 ; C125.2 51.02,33.31 ; 2.76,25.49 2.34,25.91 v1(2.34,26.07) ; v1(83.08,23.96) 83.08,24.23
  vias: v1(20.52,74.83) v1(49.76,53.19) v1(53.54,54.03) v1(54.38,73) v2(7.14,29.91) v2(7.14,29.02) v2(7.14,28.13) v2(7.14,27.24) v2(7.14,26.35) v2(7.14,25.47) v2(7.18,49.24) v2(7.18,48.35) v2(7.18,47.46) v2(7.18,46.58) v2(7.18,45.69) v2(7.18,44.8) v2(7.67,11.85) v2(7.67,10.96) v2(7.67,10.07) v2(7.67,9.18) v2(7.67,8.3) v2(7.67,7.41) v2(8.02,29.91) v2(8.02,29.02) v2(8.02,28.13) v2(8.02,27.24) v2(8.02,26.35) v2(8.02,25.47) v2(8.07,49.24) v2(8.07,48.35) v2(8.07,47.46) v2(8.07,46.58) v2(8.07,45.69) v2(8.07,44.8) v2(8.56,11.85) v2(8.56,10.96) v2(8.56,10.07) v2(8.56,9.18) v2(8.56,8.3) v2(8.56,7.41) v2(8.91,29.91) v2(8.91,29.02) v2(8.91,28.13) v2(8.91,27.24) v2(8.91,26.35) v2(8.91,25.47) v2(8.96,49.24) v2(8.96,48.35) v2(8.96,47.46) v2(8.96,46.58) v2(8.96,45.69) v2(8.96,44.8) v2(9.45,11.85) v2(9.45,10.96) v2(9.45,10.07) v2(9.45,9.18) v2(9.45,8.3) v2(9.45,7.41) v2(9.85,49.24) v2(9.85,48.35) v2(9.85,47.46) v2(9.85,46.58) v2(9.85,45.69) v2(9.85,44.8) v2(9.8,29.91) v2(9.8,29.02) v2(9.8,28.13) v2(9.8,27.24) v2(9.8,26.35) v2(9.8,25.47) v2(10.34,11.85) v2(10.34,10.96) v2(10.34,10.07) v2(10.34,9.18) v2(10.34,8.3) v2(10.34,7.41) v2(10.74,49.24) v2(10.74,48.35) v2(10.74,47.46) v2(10.74,46.58) v2(10.74,45.69) v2(10.74,44.8) v2(10.69,29.91) v2(10.69,29.02) v2(10.69,28.13) v2(10.69,27.24) v2(10.69,26.35) v2(10.69,25.47) v2(11.22,11.85) v2(11.22,10.96) v2(11.22,10.07) v2(11.22,9.18) v2(11.22,8.3) v2(11.22,7.41) v2(11.62,49.24) v2(11.62,48.35) v2(11.62,47.46) v2(11.62,46.58) v2(11.62,45.69) v2(11.62,44.8) v2(11.58,29.91) v2(11.58,29.02) v2(11.58,28.13) v2(11.58,27.24) v2(11.58,26.35) v2(11.58,25.47) v2(12.11,11.85) v2(12.11,10.96) v2(12.11,10.07) v2(12.11,9.18) v2(12.11,8.3) v2(12.11,7.41) v2(19.59,76.79) v2(19.59,75.4) v2(19.59,74.01) v2(19.59,72.62) v2(20.61,75.78) v2(20.61,74.01) v2(20.93,76.79) v2(22.11,75.78) v2(22.28,76.79) v2(23.62,76.79) v2(23.62,75.78) v2(24.01,71.93) v2(24.01,69.9) v2(24.01,67.86) v2(24.01,65.83) v2(24.01,63.8) v2(24.01,61.77) v2(24.01,59.74) v2(24.01,57.7) v2(24.01,55.67) v2(24.01,53.64) v2(24.01,51.61) v2(24.01,49.58) v2(24.01,47.54) v2(24.01,45.51) v2(24.01,43.48) v2(24.97,76.79) v2(25.13,75.78) v2(26.04,71.93) v2(26.04,69.9) v2(26.04,67.86) v2(26.04,65.83) v2(26.04,63.8) v2(26.04,61.77) v2(26.04,59.74) v2(26.04,57.7) v2(26.04,55.67) v2(26.04,53.64) v2(26.04,51.61) v2(26.04,49.58) v2(26.04,47.54) v2(26.04,45.51) v2(26.04,43.48) v2(26.31,76.79) v2(26.64,75.78) v2(26.64,74.01) v2(27.05,70.91) v2(27.05,68.88) v2(27.05,66.85) v2(27.05,64.82) v2(27.05,62.78) v2(27.05,60.75) v2(27.05,58.72) v2(27.05,56.69) v2(27.05,54.66) v2(27.05,52.62) v2(27.05,50.59) v2(27.05,48.56) v2(27.05,46.53) v2(27.05,44.5) v2(27.25,11.39) v2(27.25,10.5) v2(27.25,9.62) v2(27.25,8.73) v2(27.25,7.84) v2(27.25,6.95) v2(27.51,29.96) v2(27.51,29.07) v2(27.51,28.18) v2(27.51,27.29) v2(27.51,26.41) v2(27.51,25.52) v2(27.65,76.79) v2(27.65,75.4) v2(27.65,74.01) v2(28.14,11.39) v2(28.14,10.5) v2(28.14,9.62) v2(28.14,8.73) v2(28.14,7.84) v2(28.14,6.95) v2(28.39,29.96) v2(28.39,29.07) v2(28.39,28.18) v2(28.39,27.29) v2(28.39,26.41) v2(28.39,25.52) v2(29.03,11.39) v2(29.03,10.5) v2(29.03,9.62) v2(29.03,8.73) v2(29.03,7.84) v2(29.03,6.95) v2(29.28,29.96) v2(29.28,29.07) v2(29.28,28.18) v2(29.28,27.29) v2(29.28,26.41) v2(29.28,25.52) v2(29.92,11.39) v2(29.92,10.5) v2(29.92,9.62) v2(29.92,8.73) v2(29.92,7.84) v2(29.92,6.95) v2(30.17,29.96) v2(30.17,29.07) v2(30.17,28.18) v2(30.17,27.29) v2(30.17,26.41) v2(30.17,25.52) v2(30.81,11.39) v2(30.81,10.5) v2(30.81,9.62) v2(30.81,8.73) v2(30.81,7.84) v2(30.81,6.95) v2(31.1,66.25) v2(31.1,64.31) v2(31.06,29.96) v2(31.06,29.07) v2(31.06,28.18) v2(31.06,27.29) v2(31.06,26.41) v2(31.06,25.52) v2(31.7,11.39) v2(31.7,10.5) v2(31.7,9.62) v2(31.7,8.73) v2(31.7,7.84) v2(31.7,6.95) v2(31.95,29.96) v2(31.95,29.07) v2(31.95,28.18) v2(31.95,27.29) v2(31.95,26.41) v2(31.95,25.52) v2(32.38,66.25) v2(32.38,64.31) v2(33.66,66.25) v2(33.66,64.31) v2(34.93,66.25) v2(34.93,64.31) v2(36.91,44.98) v2(36.88,42.7) v2(37.85,42.67) v2(37.92,44.96) v2(38.94,44.96) v2(38.94,42.67) v2(40.08,44.7) v2(40.67,42.72) v2(41.22,44.73) v2(42.77,44.78) v2(42.8,42.71) v2(44.6,44.75) v2(45.24,42.69) v2(45.82,44.75) v2(46.91,44.73) v2(46.97,42.68) v2(48.11,44.73) v2(48.06,42.67) v2(54.4,11.7) v2(54.4,10.81) v2(54.4,9.92) v2(54.4,9.03) v2(54.4,8.14) v2(54.4,7.25) v2(54.71,29.91) v2(54.71,29.02) v2(54.71,28.13) v2(54.71,27.24) v2(54.71,26.35) v2(54.71,25.47) v2(55.29,11.7) v2(55.29,10.81) v2(55.29,9.92) v2(55.29,9.03) v2(55.29,8.14) v2(55.29,7.25) v2(55.6,29.91) v2(55.6,29.02) v2(55.6,28.13) v2(55.6,27.24) v2(55.6,26.35) v2(55.6,25.47) v2(56.18,11.7) v2(56.18,10.81) v2(56.18,9.92) v2(56.18,9.03) v2(56.18,8.14) v2(56.18,7.25) v2(56.49,29.91) v2(56.49,29.02) v2(56.49,28.13) v2(56.49,27.24) v2(56.49,26.35) v2(56.49,25.47) v2(57.07,11.7) v2(57.07,10.81) v2(57.07,9.92) v2(57.07,9.03) v2(57.07,8.14) v2(57.07,7.25) v2(57.38,29.91) v2(57.38,29.02) v2(57.38,28.13) v2(57.38,27.24) v2(57.38,26.35) v2(57.38,25.47) v2(57.96,11.7) v2(57.96,10.81) v2(57.96,9.92) v2(57.96,9.03) v2(57.96,8.14) v2(57.96,7.25) v2(58.27,29.91) v2(58.27,29.02) v2(58.27,28.13) v2(58.27,27.24) v2(58.27,26.35) v2(58.27,25.47) v2(58.85,11.7) v2(58.85,10.81) v2(58.85,9.92) v2(58.85,9.03) v2(58.85,8.14) v2(58.85,7.25) v2(59.15,29.91) v2(59.15,29.02) v2(59.15,28.13) v2(59.15,27.24) v2(59.15,26.35) v2(59.15,25.47) v2(73.99,49.27) v2(73.99,48.38) v2(73.99,47.49) v2(73.99,46.6) v2(73.99,45.71) v2(73.99,44.82) v2(74.01,11.9) v2(74.01,11.01) v2(74.01,10.12) v2(74.01,9.23) v2(74.01,8.35) v2(74.01,7.46) v2(74.22,29.94) v2(74.22,29.05) v2(74.22,28.16) v2(74.22,27.27) v2(74.22,26.38) v2(74.22,25.49) v2(74.88,49.27) v2(74.88,48.38) v2(74.88,47.49) v2(74.88,46.6) v2(74.88,45.71) v2(74.88,44.82) v2(74.9,11.9) v2(74.9,11.01) v2(74.9,10.12) v2(74.9,9.23) v2(74.9,8.35) v2(74.9,7.46) v2(75.11,29.94) v2(75.11,29.05) v2(75.11,28.16) v2(75.11,27.27) v2(75.11,26.38) v2(75.11,25.49) v2(75.77,49.27) v2(75.77,48.38) v2(75.77,47.49) v2(75.77,46.6) v2(75.77,45.71) v2(75.77,44.82) v2(75.79,11.9) v2(75.79,11.01) v2(75.79,10.12) v2(75.79,9.23) v2(75.79,8.35) v2(75.79,7.46) v2(75.99,29.94) v2(75.99,29.05) v2(75.99,28.16) v2(75.99,27.27) v2(75.99,26.38) v2(75.99,25.49) v2(76.65,49.27) v2(76.65,48.38) v2(76.65,47.49) v2(76.65,46.6) v2(76.65,45.71) v2(76.65,44.82) v2(76.68,11.9) v2(76.68,11.01) v2(76.68,10.12) v2(76.68,9.23) v2(76.68,8.35) v2(76.68,7.46) v2(76.88,29.94) v2(76.88,29.05) v2(76.88,28.16) v2(76.88,27.27) v2(76.88,26.38) v2(76.88,25.49) v2(77.54,49.27) v2(77.54,48.38) v2(77.54,47.49) v2(77.54,46.6) v2(77.54,45.71) v2(77.54,44.82) v2(77.57,11.9) v2(77.57,11.01) v2(77.57,10.12) v2(77.57,9.23) v2(77.57,8.35) v2(77.57,7.46) v2(77.77,29.94) v2(77.77,29.05) v2(77.77,28.16) v2(77.77,27.27) v2(77.77,26.38) v2(77.77,25.49) v2(78.43,49.27) v2(78.43,48.38) v2(78.43,47.49) v2(78.43,46.6) v2(78.43,45.71) v2(78.43,44.82) v2(78.46,11.9) v2(78.46,11.01) v2(78.46,10.12) v2(78.46,9.23) v2(78.46,8.35) v2(78.46,7.46) v2(78.66,29.94) v2(78.66,29.05) v2(78.66,28.16) v2(78.66,27.27) v2(78.66,26.38) v2(78.66,25.49)
